# Altium PCB DataCollection.PcbDoc
Units mm, origin at the board's own origin, x right, y up, seen from the top; angles counter-clockwise.
Board outline 100 x 91.53 mm, 4 copper layers (Top Layer, GND, VCC, Bottom Layer); 127 components, 107 nets, 535 pads, 38 vias.
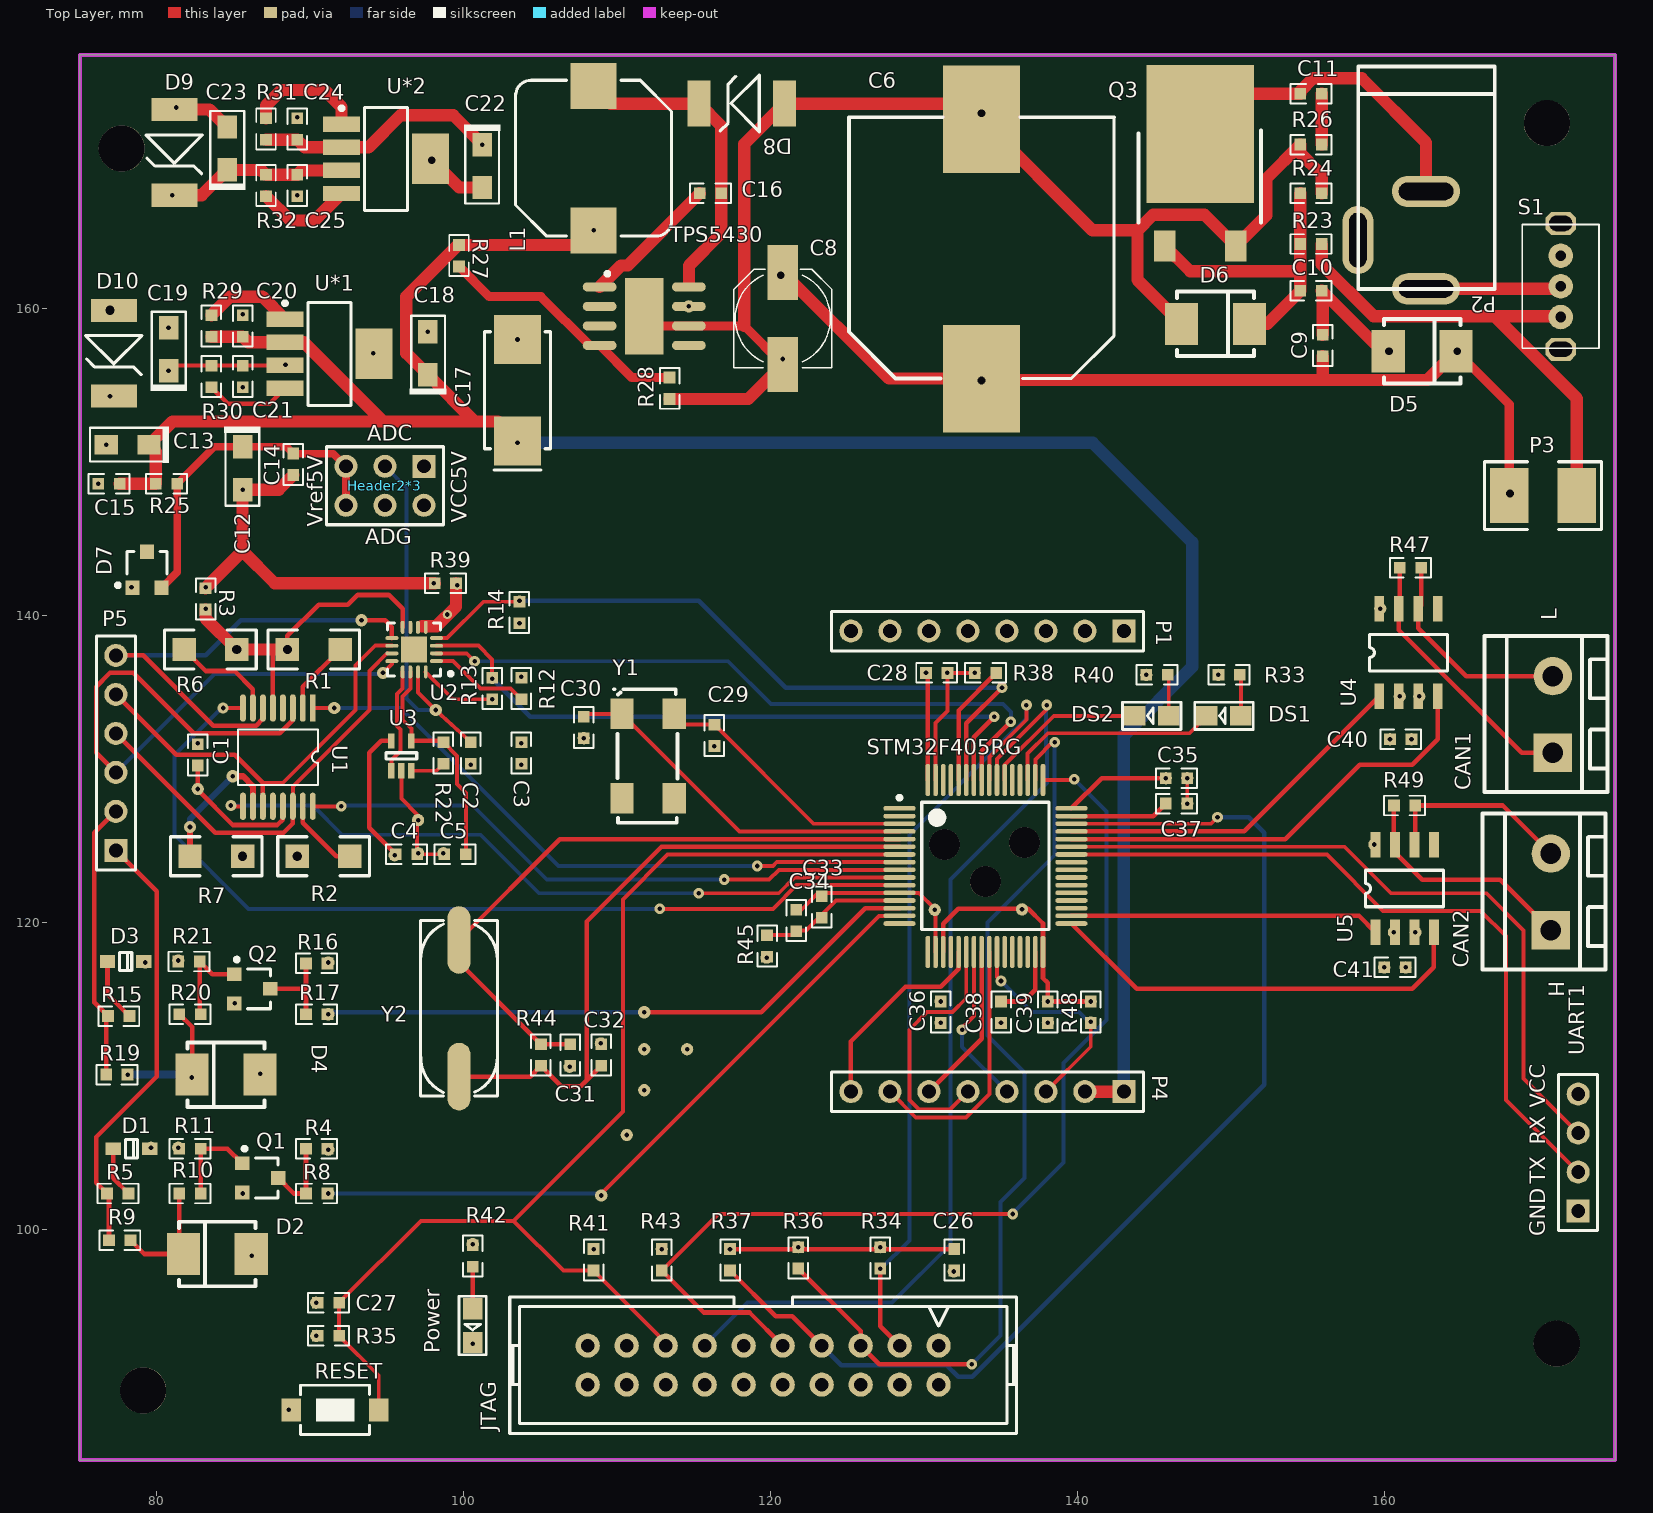
[diagram p0: Top Layer view]
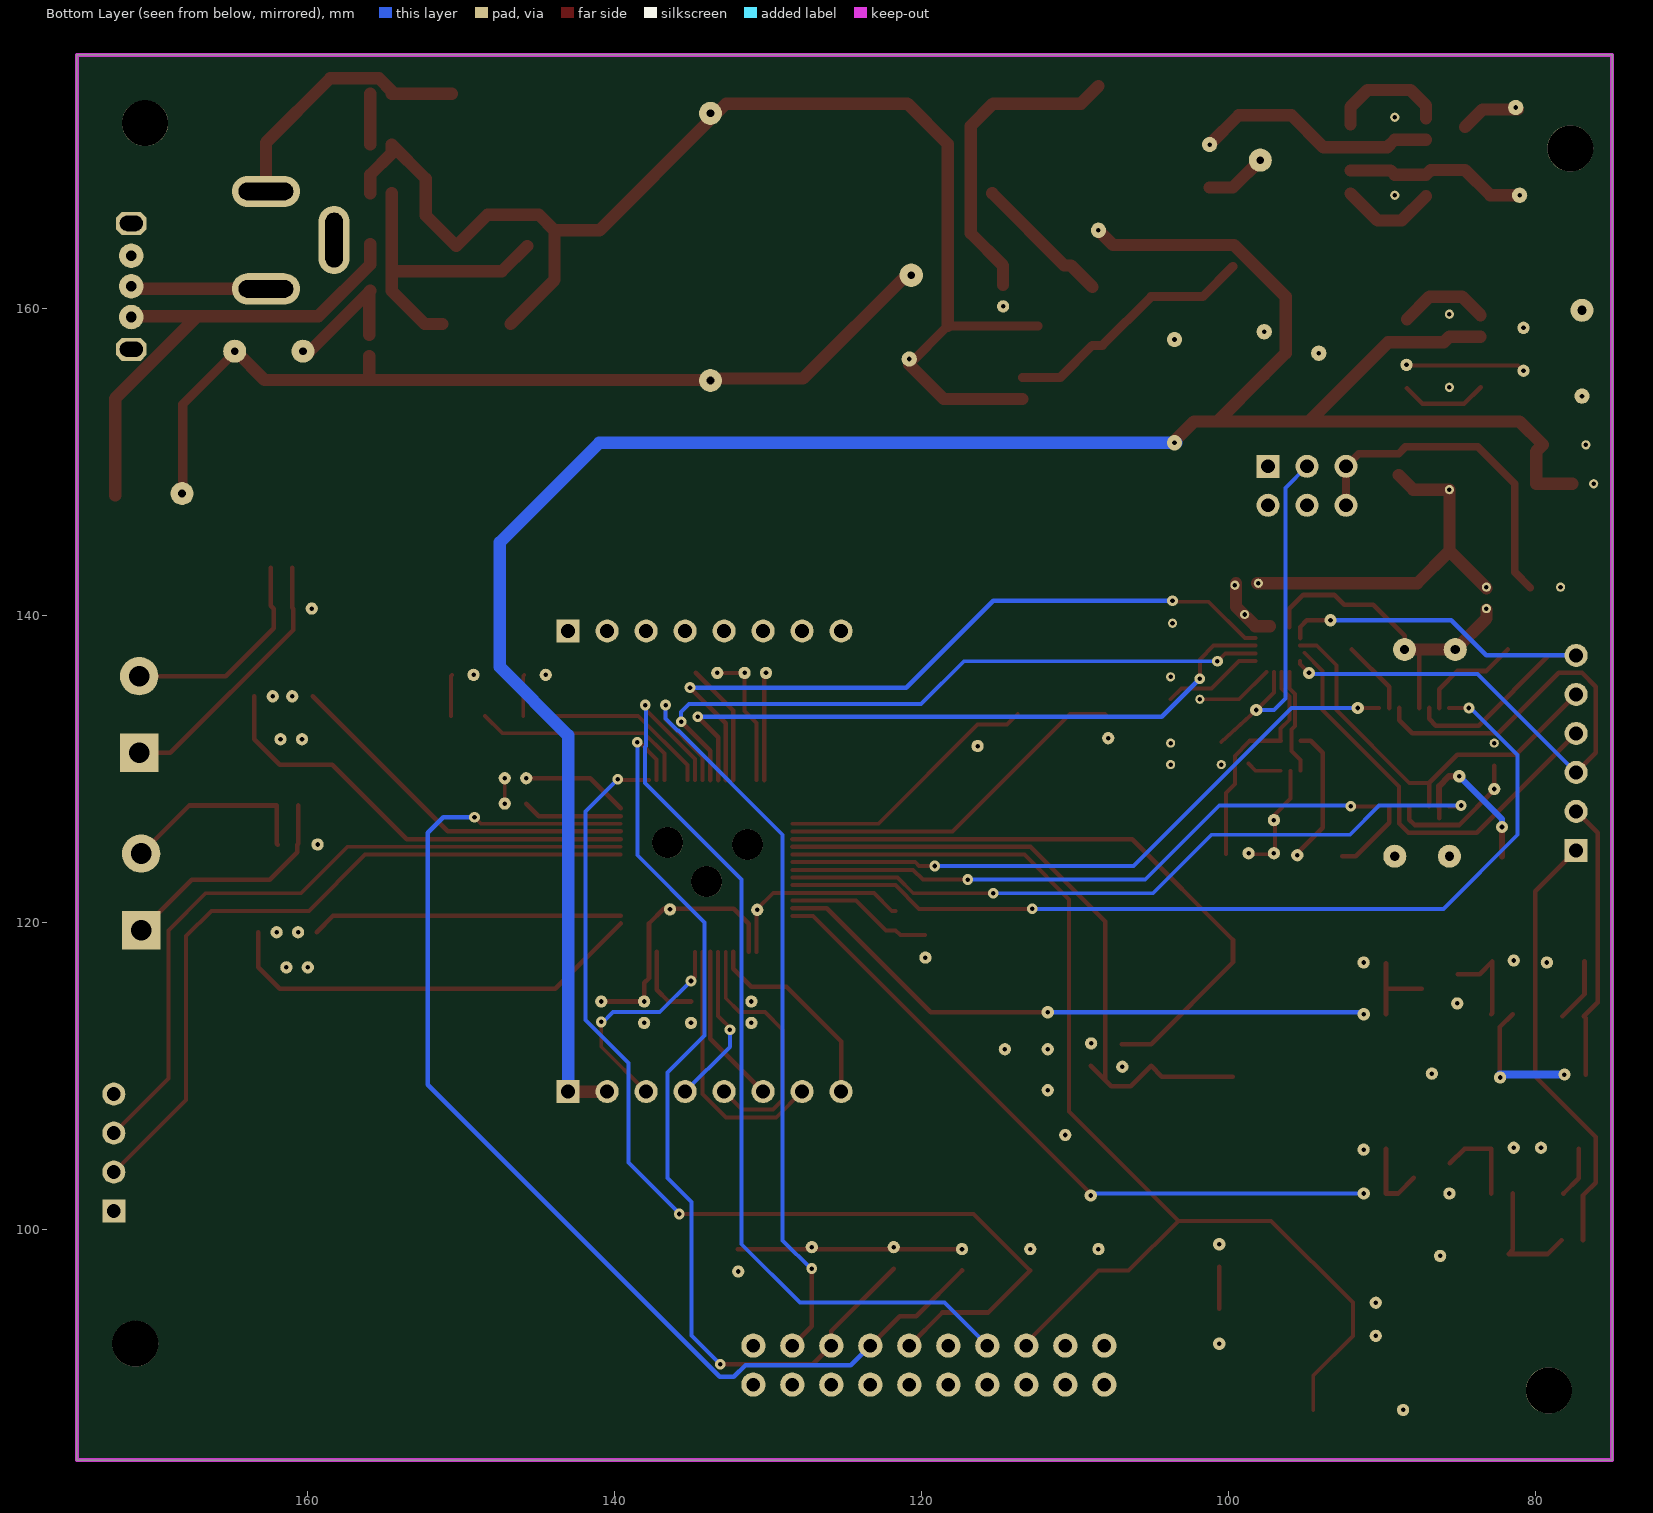
[diagram p1: Bottom Layer view, seen from below]
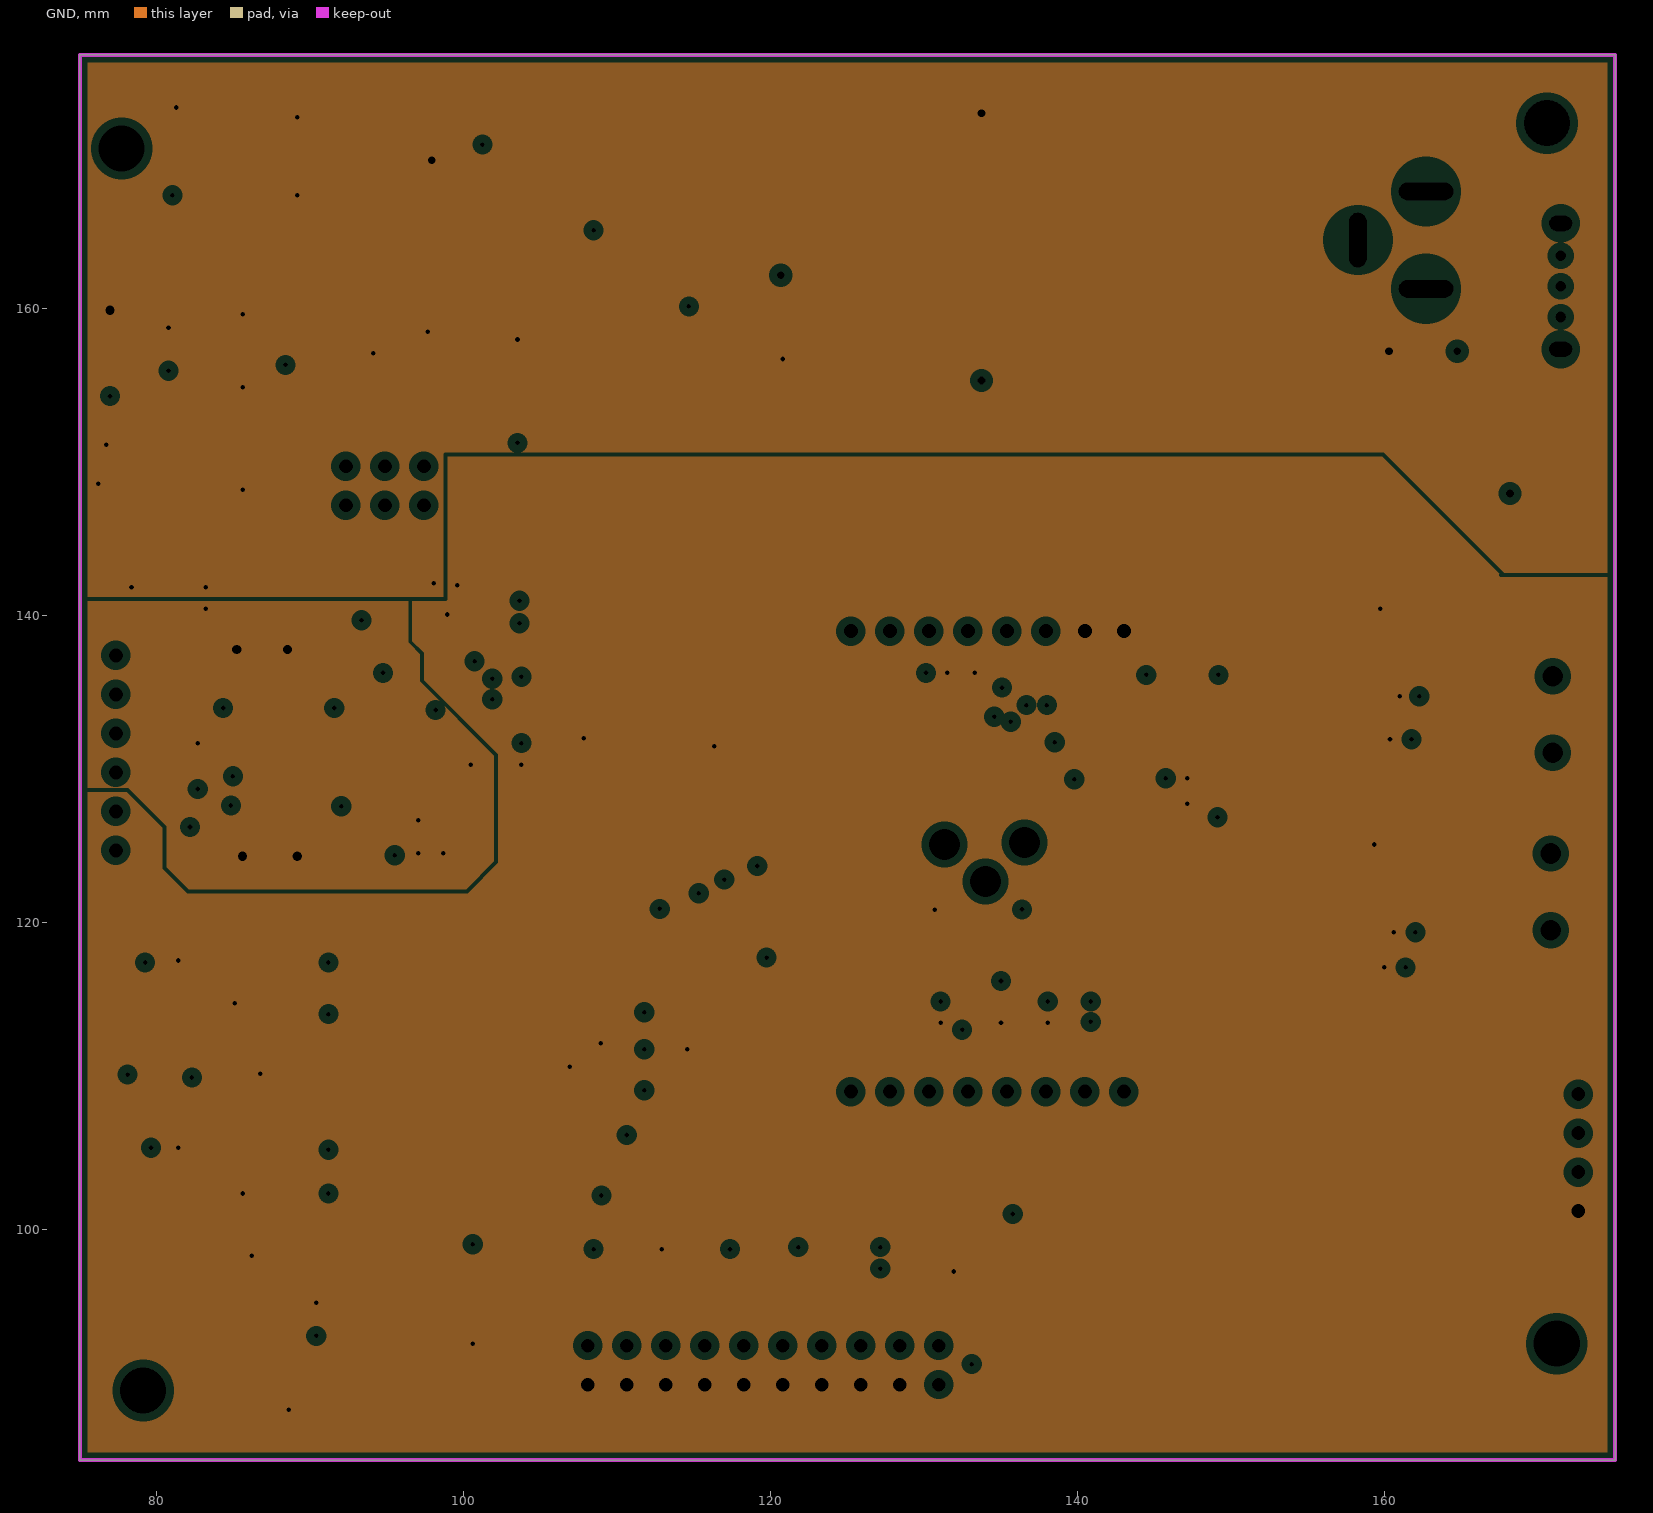
[diagram p2: GND, clearances drawn from the general rule]
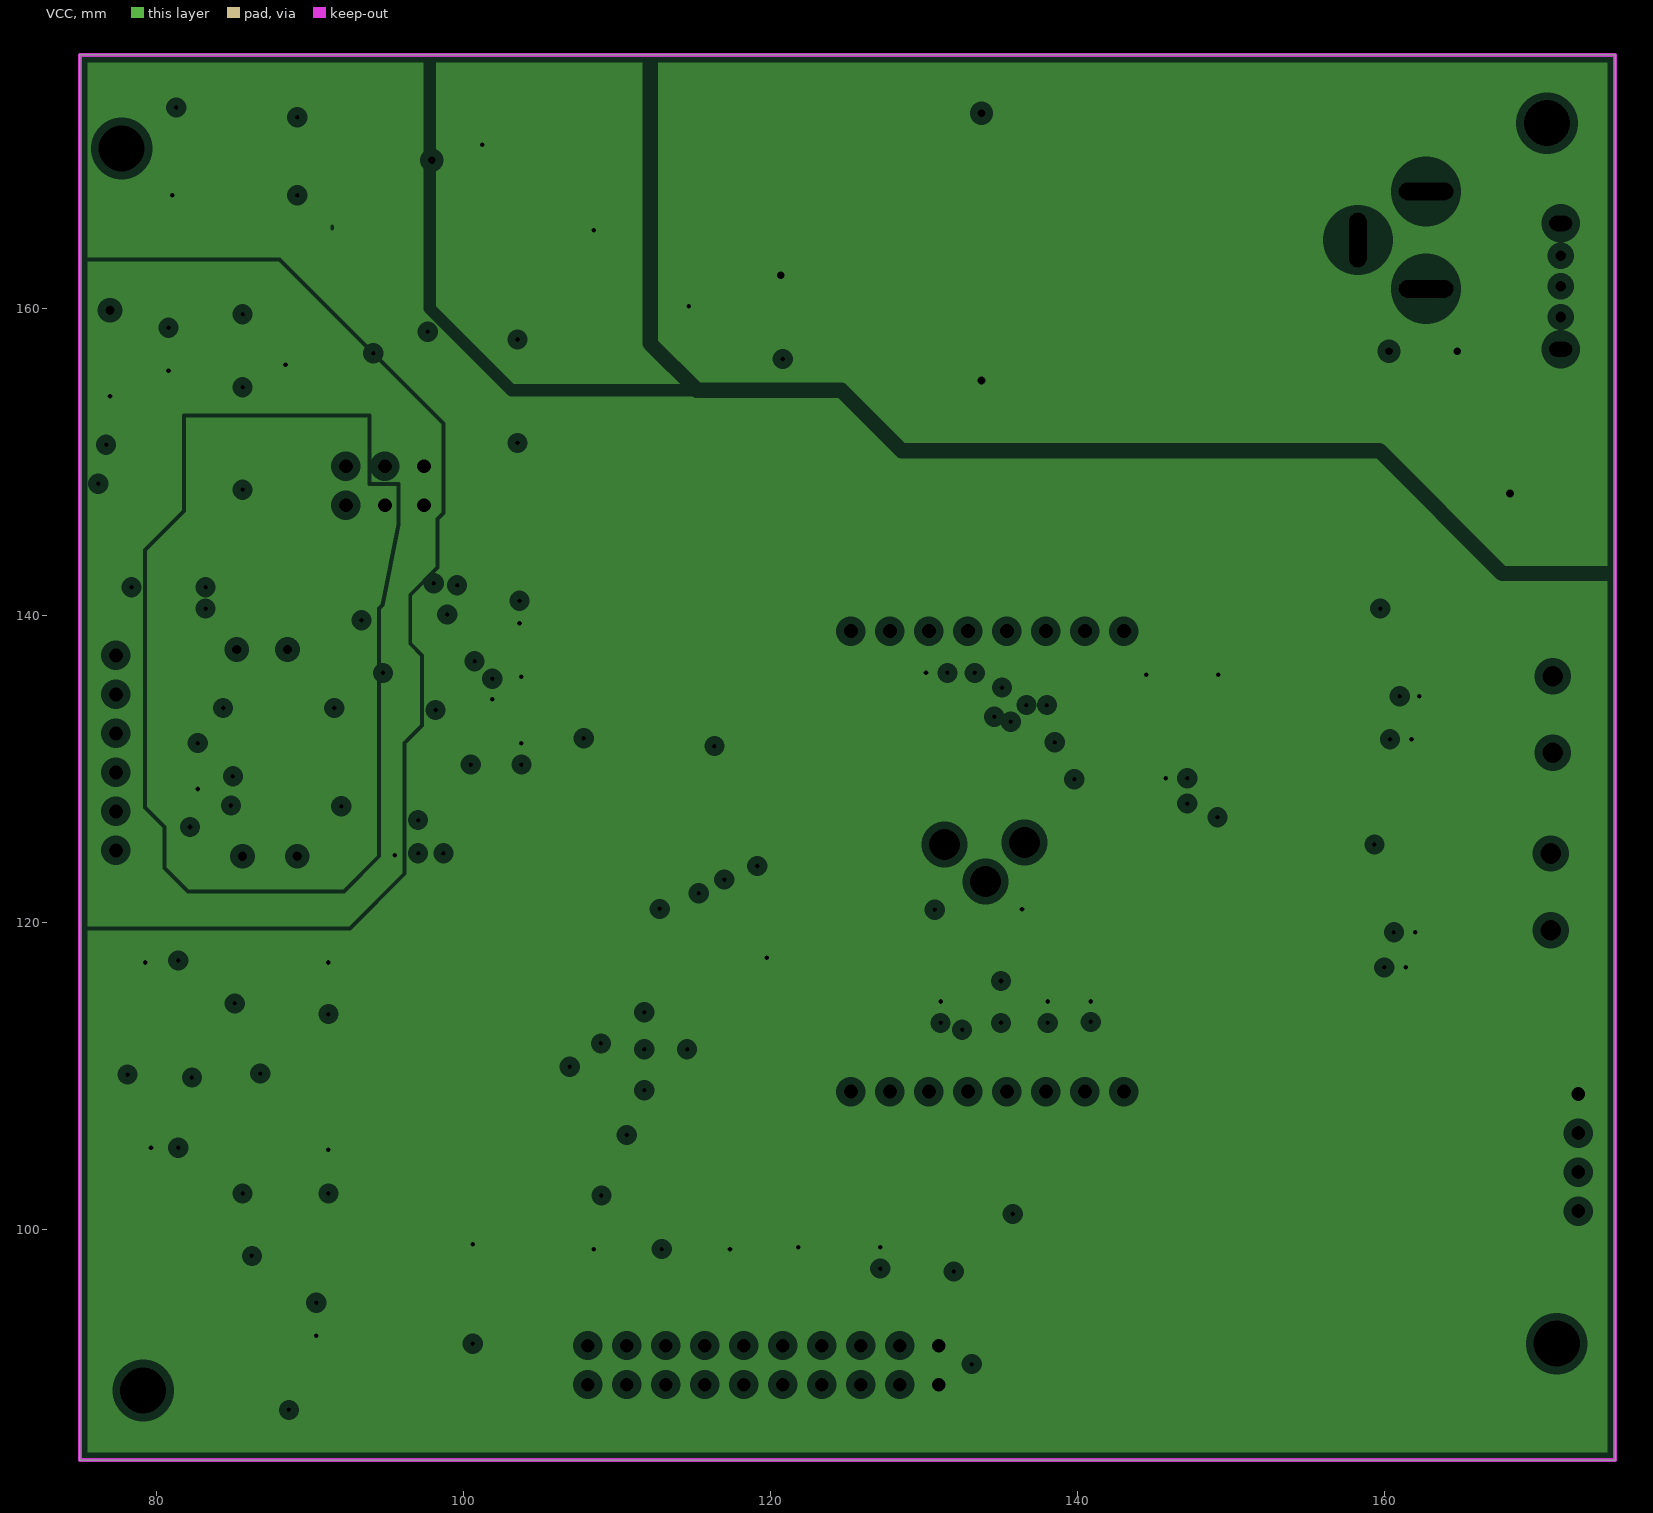
[diagram p3: VCC, clearances drawn from the general rule]
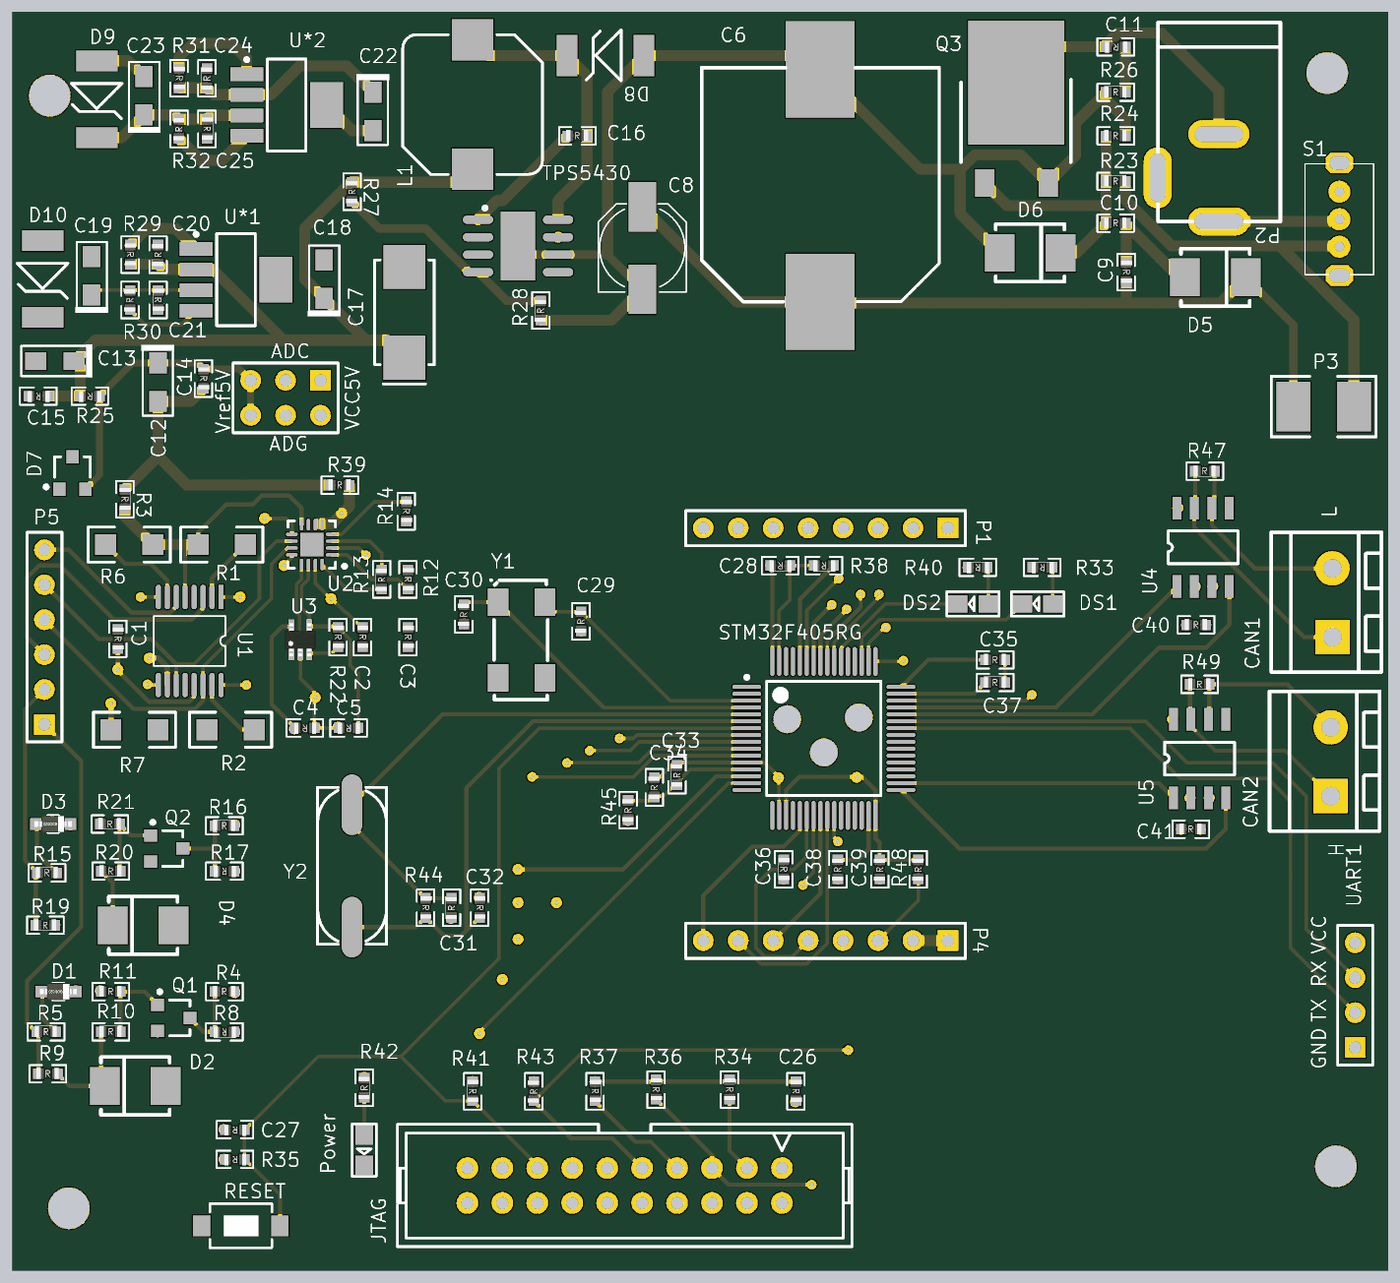
[diagram p4: 3D render of the assembled board from above, using the file's embedded part models]

## Layer stack, top to bottom
Top Layer: signal copper 0.0356
Dielectric: core 0.32, FR-4, Dk 4.8
GND: plane copper 0.0356, net (Multiple Nets)
Dielectric: prepreg 0.32, FR-4, Dk 4.8
VCC: plane copper 0.0356, net (Multiple Nets)
Dielectric: core 0.32, FR-4, Dk 4.8
Bottom Layer: signal copper 0.0356

## Board outline
75,176.53 175,176.53 175,85 75,85

## Design rules (kind name [scope] priority, off if disabled: settings)
Clearance [All] p1: gap=0.1
HoleSize [All] p1: absolutevalues=TRUE maxlimit=5 minlimit=0.3 maxpercent=80.000 minpercent=20.000
MinimumSolderMaskSliver [All] p1: minsoldermaskwidth=0
PlaneClearance [All] p1: clearance=0.508
PlaneConnect [All] p1: planeconnectstyle=Relief reliefexpansion=0.508 reliefentries=4 reliefconductorwidth=0.254 reliefairgap=0.254
PolygonConnect [All] p1: connectstyle=Relief reliefconductorwidth=0.254 reliefentries=4 polygonreliefangle="90 Angle" airgapwidth=0.254
RoutingVias [All] p1: holewidth=0.3 width=1 viastyle="Through Hole" minholewidth=0.3 minwidth=0.6 maxholewidth=0.8 maxwidth=3
SilkToSilkClearance [All] p1: silktosilkclearance=0
SilkToSolderMaskClearance [IsPad] p1: minsilkscreentomaskgap=0 clearancetoexposedcopper=TRUE
SolderMaskExpansion [All] p1: expansion=0.102
Width GND [(InNet('AGND') OR InNet('GND') OR InNet('NetP2_1'))] p1: maxlimit=0.8 minlimit=0.256 preferedwidth=0.6
Width 5Vand3V [(InNet('ADCIN') OR InNet('AVDD_ADC') OR InNet('VCC3V3') OR InNet('VCC5V') OR InNet('VREF5V'))] p2: maxlimit=0.8 minlimit=0.254 preferedwidth=0.4
Width 7V [InNet('VCC7V')] p3: maxlimit=0.8 minlimit=0.3 preferedwidth=0.6
Width 24V [(InNet('NetC11_2') OR InNet('VCC24V'))] p4: maxlimit=0.8 minlimit=0.3 preferedwidth=0.8
Width [All] p5: maxlimit=0.8 minlimit=0.254 preferedwidth=0.3
22 further rules are at their usual default settings.

## Classes and differential pairs
component class rock: C26 C27 C28 C29 C30 C31 C32 C33 C34 C35 C36 C37 C38 C39 C40 C41 CAN1 CAN2 DS1 DS2 JTAG P1 P4 Power R33 R34 R35 R36 R37 R38 R40 R41 R42 R43 R44 R45 R47 R48 R49 RESET STM32F405RG U4 U5 UART1 Y1 Y2
component class Power: C6 C8 C9 C10 C11 C12 C13 C14 C15 C16 C17 C18 C19 C20 C21 C22 C23 C24 C25 D5 D6 D7 D8 D9 D10 L1 P2 P3 Q3 R3 R23 R24 R25 R26 R27 R28 R29 R30 R31 R32 R39 S1 TPS5430 U*1 U*2
component class ADC: C1 C2 C3 C4 C5 D1 D2 D3 D4 Header2*3 P5 Q1 Q2 R1 R2 R4 R5 R6 R7 R8 R9 R10 R11 R12 R13 R14 R15 R16 R17 R19 R20 R21 R22 U1 U2 U3

## Components (designator, comment, footprint, x,y, rotation, side; value= is the part's Value field where it differs from the comment)
C1 "0.1uF" 0603 82.677,130.937 r270 top
C2 "1uF" 0603 100.457,131.064 r270 top
C3 "1uF" 0603 103.759,131.064 r270 top
C4 "1uF" 0603 96.266,124.46 r180 top
C5 "2.2nF" 0603 99.441,124.46 r180 top
C6 "470uF" SMD16 125.222,155.448 r90 top
C8 "22uF" SMD6 120.777,162.433 r270 top
C9 "0.1uF" 0603 155.956,157.607 r270 top
C10 "0.1uF" 0603 155.194,161.163 r0 top
C11 "0.1uF" 0603 155.194,173.99 r180 top
C12 "Cap Pol3" CAP-3216 85.598,149.606 r270 top
C13 "Cap Pol3" CAP-3216 78.105,151.13 r180 top
C14 "0.1uF" 0603 88.9,149.86 r270 top
C15 "0.1uF" 0603 76.898,148.59 r180 top
C16 "0.01uF" 0603 116.078,167.513 r0 top
C17 "220uF" CAP-7343 103.505,154.686 r90 top
C18 "Cap Pol3" CAP-3216 97.663,157.099 r90 top
C19 "Cap Pol3" CAP-3216 80.772,157.353 r90 top
C20 "0.1uF" 0603 85.598,158.877 r90 top
C21 "0.1uF" 0603 85.598,155.575 r270 top
C22 "Cap Pol3" CAP-3216 101.219,169.291 r270 top
C23 "Cap Pol3" CAP-3216 84.582,170.434 r90 top
C24 "0.1uF" 0603 89.154,171.704 r90 top
C25 "0.1uF" 0603 89.154,168.021 r270 top
C26 "0.1uF" 0603 131.953,98.044 r270 top
C27 "0.1uF" 0603 91.186,95.25 r180 top
C28 "0.1uF" 0603 130.81,136.271 r180 top
C29 "6pF" 0603 116.332,132.207 r90 top
C30 "6pF" 0603 107.823,132.715 r90 top
C31 "20pF" 0603 106.934,111.379 r90 top
C32 "20pF" 0603 108.966,111.379 r270 top
C33 "104" 0603 123.317,121.031 r90 top
C34 "104" 0603 121.666,120.142 r90 top
C35 "0.1uF" 0603 146.431,129.413 r0 top
C36 "104" 0603 131.064,114.173 r270 top
C37 "2.2uF" 0603 146.431,127.762 r0 top
C38 "2.2uF" 0603 135.001,114.173 r90 top
C39 "104" 0603 138.049,114.173 r90 top
C40 "0.1uF" 0603 161.036,131.953 r0 top
C41 "0.1uF" 0603 160.655,117.094 r0 top
CAN1 "CAN1" HEAD2L-0.8 170.942,131.064 r90 top
CAN2 "CAN2" HEAD2L-0.8 170.815,119.507 r90 top
D1 "LRB551V-30T1G" SOD-323 78.359,105.283 r180 top
D2 "SMBJ 6.5CA" DO-214AA 86.233,98.552 r0 top
D3 "LRB551V-30T1G" SOD-323 77.978,117.475 r180 top
D4 "SMBJ 6.5CA" DO-214AA 86.804,110.236 r0 top
D5 "SMBJ 24CA" DO-214AA 160.147,157.099 r180 top
D6 "SMBJ 6CA" DO-214AA 146.685,158.877 r180 top
D7 "LM4050AIM3" SOT-23 79.375,143.002 r0 top
D8 "B340A" SMBJ 118.237,173.355 r180 top
D9 "SMBJ3.3A" SMBJ 81.153,170.307 r270 top
D10 "SMBJ5A" SMBJ 77.216,157.226 r270 top
DS1 "LED1" SMDLED 150.622,133.477 r180 top
DS2 "LED2" SMDLED 145.923,133.477 r180 top
Header2*3 "Header2*3CHOOSE" HDR2X3_2 97.409,149.733 r180 top
JTAG "JTAG" JTAG_20 119.507,91.186 r180 top
L1 "Inductor" L-SMD-10 108.458,169.799 r270 top
P1 "Header 8" HDR8X1_A1 143,139 r180 top
P2 "POWER_JACK" DC_IN 162.687,161.29 r90 top
P3 "PTC" 1812 170.307,147.828 r180 top
P4 "Header 8" HDR8X1_A1 143,109 r180 top
P5 "Header 6" HDR6X1_A 77.343,124.714 r90 top
Power "LED3" SMDLED 100.584,94.869 r270 top
Q1 "9013" SOT-23 86.741,103.378 r270 top
Q2 "9013" SOT-23 86.233,115.697 r270 top
Q3 "RFD16N05LSM" TO-252AA 145.669,164.084 r0 top
R1 "240R" 1206 91.948,137.795 r180 top
R2 "240" 1206 89.154,124.333 r0 top
R3 "0R" 0603 83.185,141.097 r270 top
R4 "1K" 0603 90.424,105.283 r0 top
R5 "1K" 0603 77.47,102.362 r0 top
R6 "240R" 1206 81.788,137.795 r0 top
R7 "240" 1206 85.598,124.333 r180 top
R8 "0R" 0603 90.424,102.362 r180 top
R9 "1K" 0603 77.597,99.314 r0 top
R10 "1K" 0603 82.169,102.362 r0 top
R11 "10K" 0603 82.169,105.283 r0 top
R12 "10K" 0603 103.759,135.255 r270 top
R13 "3K" 0603 101.854,135.255 r90 top
R14 "3K" 0603 103.632,140.208 r270 top
R15 "1K" 0603 77.534,113.919 r0 top
R16 "1K" 0603 90.424,117.348 r0 top
R17 "0R" 0603 90.424,114.046 r180 top
R19 "1K" 0603 77.406,110.109 r0 top
R20 "1K" 0603 82.169,114.046 r0 top
R21 "10K" 0603 82.105,117.475 r0 top
R22 "499R" 0603 98.679,131.064 r270 top
R23 "18K" 0603 155.194,164.211 r0 top
R24 "6K" 0603 155.194,167.513 r0 top
R25 "1K" 0603 80.645,148.59 r180 top
R26 "1K" 0603 155.194,170.688 r0 top
R27 "10K" 0603 99.695,163.449 r90 top
R28 "1.75K" 0603 113.411,154.813 r90 top
R29 "Res1" 0603 83.566,158.877 r270 top
R30 "Res1" 0603 83.566,155.575 r90 top
R31 "Res1" 0603 87.122,171.704 r270 top
R32 "Res1" 0603 87.122,168.021 r90 top
R33 "1K" 0603 149.86,136.144 r180 top
R34 "10k" 0603 127.127,98.171 r270 top
R35 "10K" 0603 91.186,93.091 r180 top
R36 "10k" 0603 121.793,98.171 r270 top
R37 "10k" 0603 117.348,98.044 r270 top
R38 "10K" 0603 133.985,136.271 r180 top
R39 "0R" 0603 98.806,142.113 r0 top
R40 "1K" 0603 145.161,136.144 r180 top
R41 "10k" 0603 108.458,98.044 r270 top
R42 "1K" 0603 100.584,98.298 r90 top
R43 "10k" 0603 112.903,98.044 r90 top
R44 "10M" 0603 105.029,111.379 r270 top
R45 "10R" 0603 119.761,118.491 r90 top
R47 "120R" 0603 161.671,143.129 r0 top
R48 "10K" 0603 140.843,114.173 r90 top
R49 "120R" 0603 161.29,127.635 r0 top
RESET "SW-PB" SW_PB2_A2 91.567,88.265 r270 top
S1 "SWITCH" Switch_2mm 171.45,157.353 r0 top
STM32F405RG "STM" LQFP-64 133.985,123.698 r0 top
TPS5430 "TPS" NSO8_TP4056 111.76,159.512 r0 top
U1 "ADG711" TSSOP16 89.916,133.604 r270 top
U2 "ADS7924" WQFN16 96.774,137.795 r180 top
U3 "OPA313" SC70-5 95.25,129.794 r270 top
U4 "TJA1050/SN65HVD232DR" SOP-8 159.639,134.747 r90 top
U5 "TJA1050/SN65HVD232DR" SOP-8 159.385,119.38 r90 top
U*1 "LP3871-5V" SOT-223-5 88.646,159.258 r0 top
U*2 "LP3871-3V3" SOT-223-5 92.329,171.958 r0 top
UART1 "Header 4" HDR4X1_A 172.593,101.219 r90 top
Y1 "MC306" XTAL_8x3.8 112.014,130.81 r90 top
Y2 "8MHz" X-SM49 99.695,114.427 r90 top

## Footprints (in the part's own frame and the unit in brackets; to place one, negate y for a bottom-side part, rotate by r counter-clockwise, add the part's x,y. Pads: shape width x height; smd on the part's side, far side on the other; paste and mask are expansions set on the pad)
0603 [mil]
  rect 30x30 smd: 1(-27.5,0) 2(27.5,0)
  silkscreen extent -53,-25 53,25, body extent -32,-15 31,17, height 21
1206 [mil]
  rect 60x60 smd: 1(0,0) 2(135,0)
  silkscreen extent -50,-50 185,50
1812 [mm] "保险丝"
  rect 2.5x3.6 smd: 1(-2.2,0) 2(2.2,0)
  silkscreen extent -3.81,-2.2 3.81,2.2, body extent -2.54,-1.65 2.67,1.65, height 1.2
CAP-3216 [mil] "钽电容"
  rect 60x50 smd: 1(-55,0) 2(55,0)
  silkscreen extent -106,-48 96,46
CAP-7343 [mm] "钽电容"
  rect 3.2x3.05 smd: 1(-3.302,0) 2(3.302,0)
  silkscreen extent -5.21,-2.16 3.81,2.16, body extent -3.68,-1.91 3.68,1.91, height 2.95
DC_IN [mil]
  oval 80x175 hole 45 slot 140 at 90 deg: 1(0,0) 2(250,0)
  oval 175x80 hole 45 slot 140 at 0 deg: 3(125,175)
  silkscreen extent 0,-176 570,174
DO-214AA [mil]
  rect 85x107.99 smd: 1(-2.99,-5) 2(-177.01,-5)
  silkscreen extent -188,-88 8,78
HDR2X3_2 [mm]
  rect 1.5x1.5 hole 0.9: 1(0,0)
  round 1.5 hole 0.9: 2(0,2.54) 3(2.54,0) 4(2.54,2.54) 5(5.08,0) 6(5.08,2.54)
  silkscreen extent -1.27,-1.27 6.35,3.81
HDR4X1_A [mm] "Connector; Header; 4 Position"
  rect 1.5x1.5 hole 0.9: 1(0,0)
  round 1.5 hole 0.9: 2(2.54,0) 3(5.08,0) 4(7.62,0)
  silkscreen extent -1.27,-1.27 8.89,1.27
HDR6X1_A [mm] "Connector; Header; 4 Position"
  rect 1.5x1.5 hole 0.9: 1(0,0)
  round 1.5 hole 0.9: 2(2.54,0) 3(5.08,0) 4(7.62,0) 5(10.16,0) 6(12.7,0)
  silkscreen extent -1.27,-1.27 13.97,1.27
HDR8X1_A1 [mm] "Connector; Header; 8x1 Position"
  rect 1.5x1.5 hole 0.9: 1(0,0)
  round 1.5 hole 0.9: 2(2.54,0) 3(5.08,0) 4(7.62,0) 5(10.16,0) 6(12.7,0) 7(15.24,0) 8(17.78,0)
  silkscreen extent -1.27,-1.27 19.05,1.3
HEAD2L-0.8 [mm]
  rect 2.5x2.5 hole 1.35: 1(0,0)
  round 2.5 hole 1.35: 2(5,0)
  silkscreen extent -2.54,-3.56 7.62,4.45
JTAG_20 [mil]
  round 62 hole 35: 1(-450,-50) 2(-450,50) 3(-350,-50) 4(-350,50) 5(-250,-50) 6(-250,50) 7(-150,-50) 8(-150,50) 9(-50,-50) 10(-50,50) 11(50,-50) 12(50,50) 13(150,-50) 14(150,50) 15(250,-50) 16(250,50) 17(350,-50) 18(350,50) 19(450,-50) 20(450,50)
  silkscreen extent -650,-175 650,175
L-SMD-10 [mm] "贴片电感10*10"
  rect 3x3 smd: 1(-4.699,0) 2(4.699,0)
  silkscreen extent -5.08,-5.08 5.08,5.08, body extent -5.08,-5.08 5.08,5.08, height 4
LQFP-64 [mm] "LQFP64"
  oval 2.1x0.3 smd: 1(-5.6,3.75) 2(-5.6,3.25) 3(-5.6,2.75) 4(-5.6,2.25) 5(-5.6,1.75) 6(-5.6,1.25) 7(-5.6,0.75) 8(-5.6,0.25) 9(-5.6,-0.25) 10(-5.6,-0.75) 11(-5.6,-1.25) 12(-5.6,-1.75) 13(-5.6,-2.25) 14(-5.6,-2.75) 15(-5.6,-3.25) 16(-5.6,-3.75) 33(5.6,-3.75) 34(5.6,-3.25) 35(5.6,-2.75) 36(5.6,-2.25) 37(5.6,-1.75) 38(5.6,-1.25) 39(5.6,-0.75) 40(5.6,-0.25) 41(5.6,0.25) 42(5.6,0.75) 43(5.6,1.25) 44(5.6,1.75) 45(5.6,2.25) 46(5.6,2.75) 47(5.6,3.25) 48(5.6,3.75)
  oval 0.3x2.1 smd: 17(-3.75,-5.6) 18(-3.25,-5.6) 19(-2.75,-5.6) 20(-2.25,-5.6) 21(-1.75,-5.6) 22(-1.25,-5.6) 23(-0.75,-5.6) 24(-0.25,-5.6) 25(0.25,-5.6) 26(0.75,-5.6) 27(1.25,-5.6) 28(1.75,-5.6) 29(2.25,-5.6) 30(2.75,-5.6) 31(3.25,-5.6) 32(3.75,-5.6) 49(3.75,5.6) 50(3.25,5.6) 51(2.75,5.6) 52(2.25,5.6) 53(1.75,5.6) 54(1.25,5.6) 55(0.75,5.6) 56(0.25,5.6) 57(-0.25,5.6) 58(-0.75,5.6) 59(-1.25,5.6) 60(-1.75,5.6) 61(-2.25,5.6) 62(-2.75,5.6) 63(-3.25,5.6) 64(-3.75,5.6)
  silkscreen extent -5.72,-4.15 4.15,4.57, body extent -5,-5 5,5, height 1.6
NSO8_TP4056 [mm] "SOIC-max660"
  oval 2.2x0.6 smd: 1(-2.908,1.905) 2(-2.908,0.635) 3(-2.908,-0.635) 4(-2.908,-1.905) 5(2.908,-1.905) 6(2.908,-0.635) 7(2.908,0.635) 8(2.908,1.905)
  rect 2.5x5 smd: 9(0,0)
  silkscreen extent -2.52,2.63 -2.27,2.88
SC70-5 [mm]
  rect 1x0.42 smd mask+0.051: 1(-0.108,0.04) 2(-0.108,0.69) 3(-0.108,1.34) 4(-2.048,1.34) 5(-2.048,0.04)
  silkscreen extent -1.28,-0.31 -0.88,1.69, body extent -2.28,-0.41 0.12,1.79, height 1.1
SMBJ [mm]
  rect 1.5x3 smd: 1(-2.667,0) 2(2.921,0)
  silkscreen extent -1.02,-1.85 1.52,1.83
SMD6 [mm]
  rect 3.6x2 smd: 1(0.071,0.009) 2(6.071,0.009)
  silkscreen extent -0.13,-3.19 6.27,3.21
SMD16 [mm]
  rect 7x5 smd: 1(0,-8.5) 2(16.891,-8.5)
  silkscreen extent 0.01,-17.14 17.02,0.13, body extent 0,-17.15 17.02,0.25, height 10.9
SMDLED [mm] "贴片LED"
  rect 1.4x1.27 smd: 1(0.001,-0.002) 2(2.211,-0.002)
  silkscreen extent -0.8,-0.89 3.01,0.89
SOD-323 [mm]
  rect 1x0.83 smd: 1(1.18,0) 2(-1.18,0)
  silkscreen extent -0.4,-0.6 0.4,0.6, body extent -1.35,-0.62 1.35,0.63, height 1.1
SOP-8 [mil]
  rect 65x25 smd: 1(0,0) 2(0,-50) 3(0,-100) 4(0,-150) 5(224.41,-150) 6(224.41,-100) 7(224.41,-50) 8(224.41,0)
  silkscreen extent 65,-175 159,25
SOT-23 [mm]
  rect 0.9x0.95 smd: 1(-0.95,-1.175) 2(0.95,-1.175) 3(0,1.175)
  silkscreen extent -2.03,-1.14 1.3,1.18
SOT-223-5 [mm]
  rect 2.4x1 smd: 1(-0.285,0.047) 2(-0.285,-1.453) 3(-0.285,-2.953) 4(-0.285,-4.453)
  rect 2.4x3.3 smd: 5(5.515,-2.203)
  silkscreen extent -0.41,-5.55 4.02,1.22, body extent 0.77,-5.55 4.47,1.15, height 1.8
SW_PB2_A2 [mm] "3*4mm"
  rect 1.5x1.25 smd: 1(0,2.9) 2(0,-2.8)
  silkscreen extent -1.6,-2.2 1.6,2.3, body extent -0.76,-1.14 0.76,1.27, height 1.2
Switch_2mm [mm]
  round 1.6 hole 0.7: 1(0,2.1) 2(0,4.1) 3(0,6.1)
  oct 2x1.5 hole 1 slot 1.5 at 0 deg: 4(0,8.2) 5(0,0)
  silkscreen extent -2.5,0.07 2.5,8.13
TO-252AA [mm]
  rect 1.4x2 smd: 1(0,0) 2(4.623,0)
  rect 7x9 smd: 3(2.3,7.3)
  silkscreen extent -1.72,1.52 6.26,7.51
TSSOP16 [mil]
  rect 70x15 smd: 1(-15,10)
  oval 70x15 smd: 2(-15,-15.59) 3(-15,-41.18) 4(-15,-66.77) 5(-15,-92.36) 6(-15,-117.95) 7(-15,-143.54) 8(-15,-169.13) 9(236.97,-169.13) 10(236.97,-143.54) 11(236.97,-117.95) 12(236.97,-92.36) 13(236.97,-66.77) 14(236.97,-41.18) 15(236.97,-15.59) 16(236.97,10)
  silkscreen extent 40,-182 182,23
WQFN16 [mm] "QFN, 16-Leads, Body 3.00x3.00mm, Pitch 0.50mm, Thermal Pad 1.70x1.70mm, IPC Medium Density"
  oval 0.85x0.25 smd: 1(-1.45,0.75) 2(-1.45,0.25) 3(-1.45,-0.25) 4(-1.45,-0.75) 9(1.45,-0.75) 10(1.45,-0.25) 11(1.45,0.25) 12(1.45,0.75)
  oval 0.25x0.85 smd: 5(-0.75,-1.45) 6(-0.25,-1.45) 7(0.25,-1.45) 8(0.75,-1.45) 13(0.75,1.45) 14(0.25,1.45) 15(-0.25,1.45) 16(-0.75,1.45)
  rect 1.7x1.7 smd: 17(0,0)
  silkscreen extent -2.5,-1.73 1.73,1.73, body extent -1.58,-1.58 1.58,1.58, height 0.8
X-SM49 [mm]
  oval 4.4x1.5 smd: 1(4.45,0.004) 2(-4.45,-0.004)
  silkscreen extent -5.7,-2.5 5.72,2.5
XTAL_8x3.8 [mm] "四脚晶振"
  rect 2x1.5 smd: 1(2.8,1.7) 2(-2.7,1.7) 3(-2.7,-1.7) 4(2.8,-1.7)
  silkscreen extent -4.3,-1.9 4.4,2.23

## Part data
C1 C2 C3 C4 C5 C14 C15 C16 C20 C21 C24 C25 C26 C27 C28 C29 C30 C31 C32 C33 C34 C35 C36 C37 C38 C39 C40 C41: library part C
C6: library part CAP+_100uF, "Cap,100uF,DIP"
C8: library part CAP+_100uF, "钽电容 SMD 6.3*5.5  50V"
C9 C10 C11: library part C_0.1uF, "Cap,0.1uF,104"
C12 C13 C18 C19 C22 C23: "Polarized Capacitor (Surface Mount)"
C17: library part CAP, "钽电容/220uF(227) ±10% 16V"
CAN1 CAN2: library part HEAD2
D1 D3: library part "D_DIODE LRB", "LRB551V-30T1G  20V  0.5A 肖特基二极管"
D2 D4: "TVS,SMBJ 6.5CA,600W SMD Transient Voltage Suppressor Diodes,"
D5 D6: library part "SMBJ 6.5CA", "TVS,SMBJ 6.5CA,600W SMD Transient Voltage Suppressor Diodes,"
D7: library part D
D8 D9 D10: library part SMBJ, "TVS"
DS1 Power: library part LED2, "Typical RED, GREEN, YELLOW, AMBER GaAs LED"
DS2: "Typical RED, GREEN, YELLOW, AMBER GaAs LED"
Header2*3: "2*3"
L1: "电感"
P1 P4: "Header, 8-Pin"
P5 UART1: "接插件"
Q1 Q2: library part L2SC4617RT1G, "L2SC4617RT1G"
Q3: library part IGBT-N, "Insulated Gate Bipolar Transistor (N-Channel)"
R1 R2 R6 R7 R8 R13 R14 R17 R22 R23 R24 R25 R26 R27 R28 R33 R34 R36 R37 R38 R40 R41 R42 R43 R44 R45 R47 R48 R49: library part R
R3 R4 R5 R9 R10 R11 R12 R15 R16 R19 R20 R21 R39: library part R_1K, "Res,1K,0603"
R29 R30 R31 R32: "贴片电阻"
R35: library part Res1, "贴片电阻"
RESET: "微动开关"
STM32F405RG: library part STM32F405RG, "STM32F405RG_64Pins"
TPS5430: library part TPS5430, "降压开关电源芯片"
U4 U5: library part SN65HVD230D
U*1: library part LP3871, "LDO电源芯片5V"
U*2: library part LP3871, "LDO电源芯片3V3"
Y1: library part XTAL_8x3.8, "贴片晶振MC306"
Y2: library part XTAL, "Crystal Oscillator"

## Free pads (board coordinates)
  round 3 hole 3: 0(77.724,170.434) 0(79.121,89.535) 0(170.561,172.085) 0(171.196,92.583)
  round 0.8 hole 0.3: 0(114.668,160.147) 1(79.248,117.411) 1(79.629,105.346) 1(81.407,105.346) 1(81.407,117.538) 1(82.296,109.918) 1(82.677,128.714) 1(85.09,114.745) 1(86.741,110.172) 1(91.186,105.219) 1(91.186,117.411) 1(95.504,124.396) 1(97.028,124.523) 1(97.028,126.682) 1(98.679,124.523) 1(107.823,132.022) 1(108.458,98.742) 1(112.903,98.742) 1(116.332,131.508) 1(117.348,98.742) 1(121.793,98.87) 1(127.127,98.87) 2(80.772,155.956) 2(80.772,158.75) 2(88.392,156.337) 2(110.617,106.172) 2(111.76,109.093) 2(111.76,111.76) 2(114.554,111.76) 5(85.598,102.362) 5(86.201,98.298) 5(88.614,88.265) 5(90.392,93.091) 5(90.392,95.25) 5(106.902,110.617) 5(108.934,112.141) 5(119.729,117.729) 5(131.921,97.282) 6(130.112,136.271) 6(131.508,136.271) 6(133.286,136.271) 6(144.463,136.144) 6(145.732,129.413) 6(147.13,127.762) 6(147.13,129.413) 6(149.161,136.144) 6(159.321,125.095) 6(159.702,140.462) 6(159.957,117.094) 6(160.338,131.953) 6(160.591,119.38) 6(160.972,134.747) 6(161.353,117.094) 6(161.734,131.953) 6(161.988,119.38) 6(162.243,134.747) 8(130.683,120.84) 8(131.064,113.474) 8(131.064,114.871) 8(135.001,113.474) 8(136.368,120.87) 8(138.049,113.474) 8(138.049,114.871) 8(140.843,114.871)
  round 1.524 hole 0.5: 0(120.65,162.179)
  round 0.6 hole 0.3: 2(76.2,148.59) 2(76.708,151.13) 2(78.359,141.859) 2(82.677,131.699) 2(83.185,140.462) 2(83.185,141.859) 2(85.598,148.209) 2(85.598,154.876) 2(85.598,159.639) 2(89.154,167.386) 2(89.154,172.466) 2(98.044,142.113) 2(98.933,140.081) 2(99.568,141.986) 2(100.457,130.302) 2(101.854,134.556) 2(103.632,139.51) 2(103.759,130.302) 2(103.759,131.699) 2(103.759,136.017)
  round 1 hole 0.3: 2(76.962,154.305) 2(81.026,167.386) 2(81.28,173.101) 2(94.107,157.099) 2(97.663,158.496) 2(101.219,170.688) 2(103.505,157.988) 2(108.458,165.1) 2(120.777,156.718)
  round 1.5 hole 0.6: 2(76.962,159.893) 2(85.217,137.795) 2(85.598,124.333) 2(88.519,137.795) 2(89.154,124.333)
  round 1.5 hole 0.5: 2(97.917,169.672) 2(133.731,155.321) 2(133.731,172.72) 2(160.274,157.226) 2(164.719,157.226) 2(168.148,147.955)
  round 2 hole 2: 9(131.318,125.095) 9(133.985,122.682) 9(136.525,125.222)

## Via types
v1: diameter 0.7, hole 0.3, Top Layer to Bottom Layer, 24 vias
v2: diameter 0.8, hole 0.3, Top Layer to Bottom Layer, 13 vias
v3: diameter 1, hole 0.3, Top Layer to Bottom Layer, 1 vias

## Nets (pads, with @x,y where several pads share a name; then routed paths per layer and width w, separated by ;. In a path a pad name is that pad's centre, name@x,y a point inside that pad or via, vN(x,y) a via of type N, cw(c..) or ccw(c..) an arc to the next point about the centre after c; other vN are vias at no path point)
ADC_INT: STM32F405RG.57 U2.2 | length 44.2
  Top Layer w0.256: U2.2 100.199,137.545 v1(100.711,137.033)
  Top Layer w0.3: STM32F405RG.57 133.735,131.195 v1(135.636,133.096)
  Bottom Layer w0.256: v1(100.711,137.033) 117.221,137.033 120.015,134.239 135.128,134.239 135.636,133.731 v1(135.636,133.096)
ADCIN: C5.1 R22.1 U2.14 U3.4 | length 15
  Top Layer w0.256: U2.14 96.524,135.259 96.012,134.747 96.012,133.223 96.59,132.645 U3.4 ; R22.1@98.6,131.842 R22.1 99.568,130.874 99.568,129.032 100.139,128.46 C5.1
  Top Layer w0.3: U3.4 R22.1@98.6,131.842
AGND: C1.1 C2.2 C4.1 C5.2 pad.1@97.028,124.523 pad.1@97.028,126.682 pad.1@98.679,124.523 pad.2@82.677,131.699 pad.2@83.185,140.462 pad.2@85.217,137.795 pad.2@85.598,124.333 pad.2@88.519,137.795 pad.2@89.154,124.333 pad.2@100.457,130.302 R1.2 R2.1 R3.2 R6.2 R7.1 U1.5 U2.8 U3.2 | length 29.3
  Top Layer w0.256: U3.2 95.94,128.088 96.965,127.063 C4.1 C5.2
  Top Layer w0.3: 87.503,137.795 87.57,137.728 U1.5 ; R1.2 88.519,138.684 90.551,140.716 92.456,140.716 93.091,141.351 95.123,141.351 96.024,140.45 U2.8
  Top Layer w0.8: R3.2 83.185,139.827 R6.2 87.503,137.795 R1.2
AVDD_ADC: C2.1 Header2*3.3 U2.15 | length 24
  Top Layer w0.256: U2.15 97.024,135.005 v2(98.171,133.858) C2.1
  Bottom Layer w0.256: Header2*3.3 96.286,148.316 96.286,134.6 97.028,133.858 v2(98.171,133.858)
BOOT1: STM32F405RG.28
CAN1_RX: STM32F405RG.44 U4.4 | length 29.4
  Top Layer w0.3: STM32F405RG.44 153.515,125.448 158.369,130.302 161.798,130.302 163.449,131.953 U4.4
CAN1_TX: STM32F405RG.45 U4.1 | length 23.7
  Top Layer w0.3: STM32F405RG.45 150.84,125.948 U4.1
CAN2_RX: STM32F405RG.33 U5.4 | length 28.2
  Top Layer w0.3: STM32F405RG.33 143.836,115.697 161.798,115.697 163.195,117.094 U5.4
CAN2_TX: STM32F405RG.34 U5.1 | length 20.2
  Top Layer w0.3: STM32F405RG.34 158.317,120.448 U5.1
CH1: P5.3 U1.3 U2.12 | length 43.1
  Top Layer w0.256: v2(94.742,136.271) 95.324,136.853 U2.12
  Top Layer w0.3: P5.3 76.073,131.064 76.073,135.382 76.962,136.271 78.486,136.271 82.423,132.334 88.011,132.334 88.87,133.193 U1.3
  Bottom Layer w0.256: P5.3 83.757,136.208 v2@94.679,136.208
CH2: P5.4 U1.14 U2.11 | length 28.1
  Top Layer w0.256: U1.14 88.87,128.875 93.853,133.858 93.853,136.404 U2.11@95.034,137.585
  Top Layer w0.3: P5.4 83.82,125.857 88.265,125.857 88.87,126.462 U1.14
CH3: P5.5 U1.11 U2.10 | length 27.3
  Top Layer w0.256: U1.11 U1.11@86.92,127.814 ; 86.92,129.107 88.213,129.107 92.964,133.858 92.964,136.771 94.238,138.045 U2.10
  Top Layer w0.3: P5.5 81.28,130.937 85.09,130.937 86.92,129.107 U1.11@86.92,127.814
CH4: P5.6 U1.6 U2.9 | length 32.2
  Top Layer w0.3: P5.6 79.121,137.414 83.693,132.842 86.487,132.842 86.92,133.275 U1.6 ; v2(93.345,139.7) 94.89,139.7 95.324,139.266 U2.9
  Bottom Layer w0.3: P5.6 83.185,137.414 85.471,139.7 v2(93.345,139.7)
DGND: C3.2 C26.2 C27.2 C28.1 C29.1 C30.1 C31.1 C32.1 C33.2 C34.2 C35.2 C36.2 C37.2 C38.1 C39.1 C40.1 C41.1 D2.1 D4.1 JTAG.4 JTAG.6 JTAG.8 JTAG.10 JTAG.12 JTAG.14 JTAG.16 JTAG.18 JTAG.20 P1.1 P1.2 pad.1@81.407,105.346 pad.1@81.407,117.538 pad.1@85.09,114.745 pad.1@86.741,110.172 pad.1@107.823,132.022 pad.1@112.903,98.742 pad.1@116.332,131.508 pad.2@98.933,140.081 pad.2@99.568,141.986 pad.2@103.759,130.302 pad.2@114.554,111.76 pad.5@85.598,102.362 pad.5@86.201,98.298 pad.5@88.614,88.265 pad.5@90.392,95.25 pad.5@106.902,110.617 pad.5@108.934,112.141 pad.5@131.921,97.282 pad.6@131.508,136.271 pad.6@133.286,136.271 pad.6@147.13,127.762 pad.6@147.13,129.413 pad.6@159.321,125.095 pad.6@159.702,140.462 pad.6@159.957,117.094 pad.6@160.338,131.953 pad.6@160.591,119.38 pad.6@160.972,134.747 pad.8@130.683,120.84 pad.8@131.064,113.474 pad.8@135.001,113.474 pad.8@138.049,113.474 Power.2 Q1.2 Q2.2 R11.1 R21.1 R38.2 R39.2 R43.2 RESET.2 STM32F405RG.12 STM32F405RG.18 STM32F405RG.63 U2.5 U2.6 U4.2 U4.8 U5.2 U5.8 UART1.1 | length 28
  Top Layer w0.256: C34.2@121.666,120.777 121.92,120.777 123.091,121.948 STM32F405RG.12 129.639,121.948 130.735,120.852 STM32F405RG.18 ; STM32F405RG.63 130.735,133.021 131.508,133.794 C28.1 R38.2 ; C37.2 C35.2 ; U5.8@159.385,124.885 U5.8
  Top Layer w0.8: 97.282,139.319 98.236,139.319 99.504,140.587 R39.2
  other v2: 100.584,92.583
DIGITAL_INPUT1: R8.1 STM32F405RG.15 | length 44.9
  Top Layer w0.256: v2(108.966,102.235) 108.966,102.362 127.052,120.448 STM32F405RG.15
  Bottom Layer w0.256: v2(91.186,102.362) 108.839,102.362 v2(108.966,102.235)
DIGITAL_INPUT2: R17.1 STM32F405RG.14 | length 40.1
  Top Layer w0.3: v2(111.76,114.173) 119.38,114.173 126.155,120.948 STM32F405RG.14
  Bottom Layer w0.3: v2(91.186,114.046) 91.313,114.173 v2(111.76,114.173)
DIO1: P5.1 R5.1 R9.1 | length 28.5
  Top Layer w0.3: R9.1 76.898,102.235 R5.1 76.073,103.06 76.073,106.045 80.01,109.982 80.01,122.047 P5.1
DIO2: P5.2 R15.1 R19.1 | length 18.1
  Top Layer w0.3: R19.1 76.708,113.792 R15.1 75.946,114.808 75.946,125.857 P5.2
EN1: STM32F405RG.8 U1.1 | length 42.6
  Top Layer w0.256: U1.1 v2(91.567,133.985) ; v1(119.126,123.698) 120.142,123.698 120.392,123.948 STM32F405RG.8
  Bottom Layer w0.256: v2(91.567,133.985) 95.885,133.985 106.172,123.698 v1(119.126,123.698)
EN2: STM32F405RG.9 U1.16 | length 40.5
  Top Layer w0.256: U1.16 v1(92.025,127.585) ; v1(116.967,122.809) 119.888,122.809 120.527,123.448 STM32F405RG.9
  Bottom Layer w0.256: v1(92.025,127.585) 92.068,127.628 100.591,127.628 105.41,122.809 v1(116.967,122.809)
EN3: STM32F405RG.10 U1.9 | length 47.2
  Top Layer w0.256: v1@84.759,127.585 U1.9 ; v1(115.316,121.92) 120.523,121.92 121.551,122.948 STM32F405RG.10
  Bottom Layer w0.256: v1(84.836,127.635) 90.17,127.635 92.075,125.73 101.092,125.73 104.902,121.92 v1(115.316,121.92)
EN4: STM32F405RG.11 U1.8 | length 60.9
  Top Layer w0.256: v1(84.328,133.985) U1.8 ; v1@112.649,120.904 120.142,120.904 121.686,122.448 STM32F405RG.11
  Bottom Layer w0.256: v1(84.328,133.985) 84.216,133.985 81.153,130.922 81.153,125.73 85.979,120.904 v1(112.776,120.904)
GND: C6.2 C8.2 C9.1 C10.2 C12.2 C13.2 C14.2 C15.2 C17.2 C18.2 C19.2 C20.2 C21.2 C22.2 C23.2 C24.2 C25.2 D5.1 D6.1 D7.1 D8.1 D9.1 D10.1 pad.2@76.2,148.59 pad.2@76.708,151.13 pad.2@76.962,159.893 pad.2@78.359,141.859 pad.2@80.772,158.75 pad.2@81.28,173.101 pad.2@83.185,141.859 pad.2@85.598,148.209 pad.2@85.598,154.876 pad.2@85.598,159.639 pad.2@89.154,167.386 pad.2@89.154,172.466 pad.2@94.107,157.099 pad.2@97.663,158.496 pad.2@97.917,169.672 pad.2@98.044,142.113 pad.2@103.505,157.988 pad.2@120.777,156.718 pad.2@133.731,172.72 pad.2@160.274,157.226 Q3.2 R3.1 R24.2 R26.1 R28.1 R39.1 TPS5430.6 TPS5430.9 U*1.5 U*2.5 | length 128.1
  Top Layer w0.6: TPS5430.9@112.395,158.877 TPS5430.6 118.271,158.877 C8.2
  Top Layer w0.8: D9.1 83.439,172.974 C23.2 ; R3.1 85.598,144.208 ; C14.2 87.947,148.209 C12.2 85.598,144.208 ; U*2.5 99.705,167.894 C22.2 ; R39.1 87.694,142.113 85.598,144.208 ; R28.1 118.538,154.114 C8.2 ; 118.271,158.877 118.271,170.722 D8.1 132.706,173.355 C6.2 140.961,165.1 143.891,165.1 ; D6.1 143.891,161.874 143.891,165.1 ; C10.2 C10.2@155.956,161.1 ; R24.2 155.892,168.719 154.495,170.117 R26.1 152.273,168.465 152.273,166.065 Q3.2 148.26,166.116 144.907,166.116 143.891,165.1 ; C9.1 C10.2@155.956,161.1 ; D5.1 159.83,157.226 C10.2@155.956,161.1
JTCK: JTAG.9 R43.1 STM32F405RG.49 | length 68.2
  Top Layer w0.256: R43.1 116.586,101.028 v1(135.763,101.028) ; STM32F405RG.49 v1@139.839,129.298
  Top Layer w0.3: R43.1 115.633,94.615 118.618,94.615 JTAG.9
  Bottom Layer w0.256: v1@135.636,100.965 139.065,104.394 139.065,110.871 141.859,113.665 141.859,127.254 v1(139.763,129.35)
JTDI: JTAG.5 R36.2 STM32F405RG.50 | length 62.2
  Top Layer w0.256: STM32F405RG.50 137.235,130.631 v1@138.43,131.826
  Top Layer w0.3: R36.2 125.857,93.408 JTAG.5 127.063,91.249 v1(133.096,91.249)
  Bottom Layer w0.256: v1(133.096,91.249) 134.969,93.123 134.969,101.822 136.525,103.378 136.525,110.236 134.112,112.649 134.112,120.015 138.493,124.396 v1(138.493,131.762)
JTDO: JTAG.13 STM32F405RG.55 | length 62.7
  Top Layer w0.256: STM32F405RG.55 134.735,130.671 137.922,133.858 v1@137.922,134.175
  Bottom Layer w0.256: JTAG.13 118.491,95.25 127.889,95.25 131.699,99.06 131.699,122.809 137.986,129.095 137.986,131.453 137.915,131.523 137.915,134.105 v1(137.986,134.175)
JTMS: JTAG.7 R37.2 STM32F405RG.46 | length 75.1
  Top Layer w0.256: STM32F405RG.46 148.673,126.448 v1(149.098,126.873)
  Top Layer w0.3: R37.2 120.332,94.361 121.412,94.361 JTAG.7
  Bottom Layer w0.3: JTAG.7 124.587,91.186 131.445,91.186 132.207,90.424 133.119,90.424 152.146,109.451 152.146,125.857 151.13,126.873 v1(149.098,126.873)
JTRST: JTAG.3 R34.2 STM32F405RG.56 | length 52.2
  Top Layer w0.256: STM32F405RG.56 134.235,130.806 136.652,133.223 v1(136.652,134.175)
  Top Layer w0.3: v1(127.127,97.472) 127.127,93.726 JTAG.3
  Bottom Layer w0.256: v1@127.127,97.409 129.032,99.314 129.032,125.73 135.82,132.518 135.875,132.518 136.652,133.295 v1(136.652,134.175)
MUXOUT: U2.13 U3.1 | length 6.9
  Top Layer w0.256: U3.1 95.29,130.596 95.885,131.191 95.885,132.588 95.656,132.817 95.656,134.894 96.024,135.262 U2.13
NetC10_1: C10.1 D6.2 Q3.1 R23.1 R24.1 | length 20.1
  Top Layer w0.8: Q3.1 147.32,162.433 154.495,162.433 ; D6.2 152.336,159.004 C10.1 154.495,162.433 ; R24.1 R23.1 154.495,162.433
NetC11_1: C11.1 R26.2 | length 3.3
  Top Layer w0.8: R26.2 C11.1
NetC11_2: C11.2 P2.2 Q3.3 | length 17.6
  Top Layer w0.8: Q3.3@150.575,173.99 C11.2 154.495,174.18 155.321,175.006 158.496,175.006 162.687,170.815 P2.2
NetC16_1: C16.1 TPS5430.1 | length 9.1
  Top Layer w0.8: TPS5430.1 110.249,162.814 110.68,162.814 C16.1
NetC16_2: C16.2 D8.2 L1.1 TPS5430.8 | length 20.6
  Top Layer w0.8: L1.1 109.601,173.355 D8.2 116.776,171.894 C16.2 116.776,164.909 114.668,162.801 TPS5430.8@114.668,161.544
NetC37_1: C37.1 STM32F405RG.47 | length 6.5
  Top Layer w0.3: STM32F405RG.47 144.919,126.948 C37.1
NetC38_2: C38.2 STM32F405RG.31 | length 5
  Top Layer w0.3: C38.2 136.462,114.871 137.235,115.645 STM32F405RG.31
NetCAN1_1: CAN1.1 R47.1 U4.7 | length 17.4
  Top Layer w0.3: R47.1 160.972,140.51 U4.7 160.909,139.065 168.91,131.064 CAN1.1
NetCAN1_2: CAN1.2 R47.2 U4.6 | length 14.1
  Top Layer w0.3: R47.2 162.369,140.637 U4.6 162.179,139.192 165.307,136.064 CAN1.2
NetCAN2_1: CAN2.1 R49.1 U5.7 | length 15.3
  Top Layer w0.3: R49.1 160.591,125.143 U5.7 160.655,124.587 162.433,122.809 167.513,122.809 CAN2.1
NetCAN2_2: CAN2.2 R49.2 U5.6 | length 12.7
  Top Layer w0.3: U5.6 161.988,125.143 R49.2 167.687,127.635 CAN2.2
NetD1_1: D1.1 R5.2 | length 3.3
  Top Layer w0.3: D1.1 77.179,103.352 R5.2
NetD2_2: D2.2 R9.2 R10.1 | length 7.9
  Top Layer w0.3: R9.2 79.184,98.425 D2.2 81.471,98.692 R10.1
NetD3_1: D3.1 R15.2 | length 4.1
  Top Layer w0.3: D3.1 76.798,115.353 R15.2
NetD4_2: D4.2 pad.1@82.296,109.918 R19.2 R20.1 | length 8.5
  Top Layer w0.3: R20.1 82.309,113.208 D4.2
  Bottom Layer w0.5: v2(78.105,110.109) pad.1@82.308,110.109
NetDS1_1: DS1.1 R33.1 | length 2.7
  Top Layer w0.256: R33.1 150.621,136.081 DS1.1
NetDS2_1: DS2.1 R40.1 | length 2.7
  Top Layer w0.256: R40.1 145.922,136.081 DS2.1
NetP2_1: P2.1 S1.2 | length 8.8
  Top Layer w0.8: P2.1 171.287,161.29 S1.2
NetP3_1: P3.1 R23.2 S1.1 | length 32.2
  Top Layer w0.8: R23.2 155.892,162.877 159.258,159.512 167.132,159.512 ; S1.1 171.391,159.512 167.132,159.512 ; P3.1 172.507,154.137 167.132,159.512
NetPower_1: Power.1 R42.1 | length 2.7
  Top Layer w0.3: Power.1 100.582,97.598 R42.1
NetQ1_1: Q1.1 R10.2 R11.2 | length 6
  Top Layer w0.3: R10.2 R11.2 84.611,105.283 Q1.1
NetQ1_3: Q1.3 R4.1 R8.2 | length 5.2
  Top Layer w0.3: Q1.3 88.932,102.362 R8.2 R4.1
NetQ2_1: Q2.1 R20.2 R21.2 | length 6.1
  Top Layer w0.3: R20.2 82.804,114.109 R21.2 83.632,116.647 Q2.1
NetQ2_3: Q2.3 R16.1 R17.2 | length 5.6
  Top Layer w0.3: Q2.3 89.725,115.697 ; R17.2 89.725,115.697 ; R16.1 89.725,115.697
NetR1_1: R1.1 U1.2 | length 4.8
  Top Layer w0.3: U1.2 89.52,135.367 R1.1
NetR2_2: R2.2 U1.15 | length 5
  Top Layer w0.3: U1.15 89.52,126.507 91.694,124.333 R2.2
NetR6_1: R6.1 U1.7 | length 6.8
  Top Layer w0.3: R6.1 83.185,136.398 85.09,136.398 86.27,135.218 U1.7
NetR7_2: R7.2 U1.10 | length 10
  Top Layer w0.3: U1.10@86.27,126.802 U1.10
  Top Layer w0.4: R7.2 v2(82.169,126.238) ; v2(84.963,129.54) 85.635,129.54 86.27,128.905 U1.10
  Bottom Layer w0.4: v2(82.169,126.238) 82.169,126.746 v2(84.963,129.54)
NetR12_2: R12.2 U2.1 | length 6.6
  Top Layer w0.256: U2.1 99.314,137.045 101.104,135.255 103.06,135.255 R12.2
NetR22_2: R22.2 U3.3 | length 2.3
  Top Layer w0.256: U3.3 98.215,129.902 R22.2
NetR27_1: R27.1 R28.2 TPS5430.4 | length 16.7
  Top Layer w0.6: R27.1 101.663,160.782 105.029,160.782 108.204,157.607 TPS5430.4 110.947,155.511 R28.2
NetR29_1: R29.1 U*1.1 | length 5.9
  Top Layer w0.8: R29.1 84.772,160.782 86.884,160.782 U*1.1
NetR30_1: R30.1 U*1.4 | length 5.7
  Top Layer w0.3: R30.1 84.645,153.797 87.353,153.797 U*1.4
NetR31_1: R31.1 U*2.1 | length 7.8
  Top Layer w0.8: R31.1 87.122,173.228 88.138,174.244 90.932,174.244 92.044,173.132 U*2.1
NetR32_1: R32.1 U*2.4 | length 6.3
  Top Layer w0.8: R32.1 88.709,165.735 90.274,165.735 U*2.4
NetR38_1: R38.1 STM32F405RG.60 | length 8
  Top Layer w0.3: STM32F405RG.60 132.235,133.823 R38.1
PA2: STM32F405RG.16
PA3: STM32F405RG.17
PA4: STM32F405RG.20
PA8: STM32F405RG.41
PB1: STM32F405RG.27
PB8: STM32F405RG.61
PB9: STM32F405RG.62
PB10: STM32F405RG.29
PB11: STM32F405RG.30
PB14: STM32F405RG.35
PB15: STM32F405RG.36
PC6: STM32F405RG.37
PC7: STM32F405RG.38
PC8: STM32F405RG.39
PC9: STM32F405RG.40
PC10: DS1.2 STM32F405RG.51 | length 14.4
  Top Layer w0.256: STM32F405RG.51 136.735,131.02 138.056,132.341 147.273,132.341 DS1.2
PC11: STM32F405RG.52
PC12: STM32F405RG.53
PC13: STM32F405RG.2
PC14: C29.2 STM32F405RG.3 Y1.4 | length 17.6
  Top Layer w0.256: Y1.4 114.418,132.905 C29.2 122.789,126.448 STM32F405RG.3
PC15: C30.2 STM32F405RG.4 Y1.1 | length 23.8
  Top Layer w0.256: C30.2 108.019,133.61 Y1.1 117.976,125.948 STM32F405RG.4
PD2: DS2.2 STM32F405RG.54 | length 10.8
  Top Layer w0.256: STM32F405RG.54 135.235,130.282 138.432,133.479 DS2.2
PH0: C31.2 R44.1 STM32F405RG.5 Y2.1 | length 42.3
  Top Layer w0.3: C31.2 R44.1 99.691,117.416 Y2.1 106.262,125.448 STM32F405RG.5
PH1: C32.2 R44.2 STM32F405RG.6 Y2.2 | length 43.4
  Top Layer w0.3: Y2.2 104.325,109.977 R44.2 106.362,109.347 107.632,109.347 C32.2 ; 108.013,109.728 108.013,120.078 112.883,124.948 STM32F405RG.6
RESET: C27.1 JTAG.15 R35.1 R41.2 RESET.1 STM32F405RG.7 | length 78.1
  Top Layer w0.256: RESET.1 94.467,90.509 R35.1 C27.1 97.218,100.584 103.251,100.584 ; JTAG.15@113.157,92.647 R41.2 106.489,97.346 103.251,100.584 ; STM32F405RG.7 113.284,124.448 110.363,121.527 110.363,107.696 103.251,100.584
  Top Layer w0.8: JTAG.15 JTAG.15@113.157,92.647
RESET_N: P4.3 R48.1 STM32F405RG.26 | length 14.7
  Top Layer w0.256: STM32F405RG.26 134.735,116.459 v1@134.989,116.205 ; P4.3 140.843,111.923 R48.1
  Bottom Layer w0.256: v1(135.001,116.205) 137.033,114.173 140.081,114.173 v1@140.843,113.411
  other v1: 140.843,113.538
RX: STM32F405RG.43 UART1.3 | length 46.4
  Top Layer w0.256: STM32F405RG.43 157.373,124.948 160.401,121.92 166.624,121.92 169.037,119.507 169.037,109.855 UART1.3
SCL: R13.2 STM32F405RG.58 U2.3 | length 43.6
  Top Layer w0.256: U2.3 100.969,138.045 101.854,137.16 R13.2
  Top Layer w0.3: STM32F405RG.58 133.235,132.092 v1(134.556,133.413)
  Bottom Layer w0.3: v1(101.854,135.89) 104.331,133.413 v1(134.556,133.413)
SDA: R14.1 STM32F405RG.59 U2.4 | length 47.1
  Top Layer w0.256: U2.4 98.921,138.545 101.282,140.906 R14.1
  Top Layer w0.3: STM32F405RG.59 132.735,132.989 v1(135.064,135.319)
  Bottom Layer w0.3: v1(103.632,140.97) 115.316,140.97 120.968,135.319 v1(135.064,135.319)
SPI_CLK: P4.8 STM32F405RG.21 | length 13.3
  Top Layer w0.3: P4.8 125.22,112.266 128.778,115.824 131.064,115.824 132.235,116.995 STM32F405RG.21
SPI_CS: P4.7 STM32F405RG.25 | length 17.1
  Top Layer w0.256: P4.7 129.445,107.315 132.715,107.315 134.235,108.835 STM32F405RG.25
SPI_INTR: P4.6 STM32F405RG.24 | length 10.5
  Top Layer w0.3: P4.6 133.735,112.435 STM32F405RG.24
SPI_MISO: P4.5 STM32F405RG.22 | length 16.7
  Top Layer w0.256: STM32F405RG.22 132.735,115.082 131.826,114.173 130.175,114.173 129.032,113.03 129.032,108.458 129.667,107.823 131.663,107.823 P4.5
SPI_MOSI: P4.4 STM32F405RG.23 | length 10.7
  Top Layer w0.254: v1@132.334,113.03 133.235,113.931 STM32F405RG.23
  Bottom Layer w0.254: v1(132.461,113.03) 132.461,111.919 P4.4
TX: STM32F405RG.42 UART1.2 | length 47.8
  Top Layer w0.256: STM32F405RG.42 156.222,124.448 159.893,120.777 166.243,120.777 167.894,119.126 167.894,108.458 UART1.2
VCC3V3: C3.1 C23.1 C25.1 C26.1 C28.2 C35.1 C36.1 C39.2 C40.2 C41.2 D1.2 D3.2 D9.2 JTAG.1 JTAG.2 pad.1@79.248,117.411 pad.1@79.629,105.346 pad.1@91.186,105.219 pad.1@91.186,117.411 pad.1@108.458,98.742 pad.1@117.348,98.742 pad.1@121.793,98.87 pad.1@127.127,98.87 pad.2@81.026,167.386 pad.2@101.854,134.556 pad.2@103.632,139.51 pad.2@103.759,131.699 pad.2@103.759,136.017 pad.5@90.392,93.091 pad.5@119.729,117.729 pad.6@130.112,136.271 pad.6@144.463,136.144 pad.6@145.732,129.413 pad.6@149.161,136.144 pad.6@161.353,117.094 pad.6@161.734,131.953 pad.6@161.988,119.38 pad.6@162.243,134.747 pad.8@131.064,114.871 pad.8@136.368,120.87 pad.8@138.049,114.871 pad.8@140.843,114.871 R4.2 R12.1 R13.1 R14.2 R16.2 R32.2 R33.2 R34.1 R35.2 R36.1 R37.1 R40.2 R41.1 R42.2 R45.1 R48.2 STM32F405RG.19 STM32F405RG.32 STM32F405RG.48 STM32F405RG.64 U2.16 U4.3 U5.3 U*2.3 UART1.4 | length 62.7
  Top Layer w0.256: U2.16 99.312,134.556 R13.1
  Top Layer w0.3: R37.1 C26.1 ; C28.2 130.235,136.148 STM32F405RG.64 ; STM32F405RG.19 131.235,119.932 132.207,120.904 136.779,120.904 137.735,119.948 STM32F405RG.32 137.735,116.392 138.049,116.078 C39.2 R48.2 ; STM32F405RG.48 141.55,129.413 C35.1
  Top Layer w0.8: D9.2@81.026,167.386 D9.2 82.931,167.386 C23.1 86.804,169.037 R32.2 C25.1 89.44,169.005 U*2.3
  other v2: 100.584,99.06
VCC5V: C4.2 C19.1 C21.1 D10.2 Header2*3.1 Header2*3.2 pad.1@95.504,124.396 pad.2@76.962,154.305 pad.2@80.772,155.956 pad.2@88.392,156.337 R30.2 U3.5 U*1.3 | length 16.8
  Top Layer w0.254: C19.1 81.121,156.305 U*1.3
  Top Layer w0.3: U3.5 94.631,131.842 93.853,131.064 93.853,126.174 C4.2
VCC7V: C13.1 C15.1 C17.1 C18.1 C20.1 C22.1 C24.1 L1.2 P4.1 P4.2 pad.2@101.219,170.688 pad.2@108.458,165.1 R25.2 R27.2 R29.2 R31.2 U*1.2 U*2.2 | length 170.5
  Top Layer w0.8: C15.1 R25.2 79.947,150.685 C13.1 81.026,152.654 94.742,152.654 ; R29.2 C20.1 85.971,157.805 U*1.2 89.591,157.805 94.742,152.654 ; R31.2 C24.1 89.654,170.505 U*2.2 93.797,170.505 95.885,172.593 99.314,172.593 C22.1 ; C17.1 102.235,152.654 100.711,152.654 ; L1.2 107.505,164.147 R27.2 99.623,164.147 96.266,160.791 96.266,157.099 C18.1 100.711,152.654 ; P4.2 P4.1 ; 94.742,152.654 100.711,152.654
  Bottom Layer w0.8: v3@103.378,151.257 140.97,151.257 147.447,144.78 147.447,136.652 143,132.205 P4.1
  other v3: 103.505,151.257
VCC24V: C6.1 C8.1 C9.2 D5.2 P3.2 pad.0@114.668,160.147 pad.0@120.65,162.179 pad.2@133.731,155.321 pad.2@164.719,157.226 pad.2@168.148,147.955 TPS5430.7 | length 59.9
  Top Layer w0.6: D5.2 168.107,153.762 P3.2
  Top Layer w0.8: C8.1 127.7,155.448 C6.1 133.816,155.354 155.956,155.354 ; C9.2 155.956,155.354 ; D5.2 162.771,155.354 155.956,155.354
VDD_ADG711: C1.2 Header2*3.4 pad.1@82.677,128.714 U1.13 | length 9.1
  Top Layer w0.3: C1.2 82.677,128.651 84.963,126.365 87.865,126.365 88.22,126.72 U1.13
VDDA: C33.1 C34.1 R45.2 STM32F405RG.13 | length 9.6
  Top Layer w0.256: R45.2 121.349,119.189 121.666,119.507 122.301,119.507 124.242,121.448 STM32F405RG.13
VREF5V: C12.1 C14.1 D7.2 Header2*3.5 Header2*3.6 R25.1 | length 22.2
  Top Layer w0.5: D7.2 81.343,142.845 R25.1 83.757,151.003 C12.1 88.456,151.003 C14.1 91.504,150.558 Header2*3.5 Header2*3.6
pads on no net: D7.3 JTAG.11 JTAG.17 JTAG.19 P1.3 P1.4 P1.5 P1.6 P1.7 P1.8 P2.3 S1.3 S1.4 S1.5 STM32F405RG.1 TPS5430.2 TPS5430.3 TPS5430.5 U1.4 U1.12 U2.7 U2.17 U4.5 U5.5 Y1.2 Y1.3

## Polygon pours and split planes (outlines as drawn)
GND on GND (split plane): 174.49,142.786 167.762,142.786 167.76,142.798 167.732,142.84 159.985,150.587 159.943,150.615 159.893,150.624 98.806,150.624 98.756,150.615 98.714,150.587 98.686,150.545 98.677,150.495 98.677,141.226 75.51,141.226 75.51,176.02 174.49,176.02
AGND on GND (split plane): 96.391,138.303 96.4,138.253 96.428,138.211 97.153,137.487 97.153,135.763 97.162,135.713 97.19,135.671 101.979,130.883 101.979,124.006 100.149,122.176 82.096,122.176 80.647,123.625 80.647,126.238 80.638,126.288 80.61,126.33 78.197,128.743 78.155,128.771 78.105,128.78 75.51,128.78 75.51,140.968 96.391,140.968
DGND on GND (split plane): 167.457,142.748 167.429,142.706 167.419,142.656 167.429,142.607 167.457,142.565 167.499,142.537 167.548,142.527 174.49,142.527 174.49,85.51 75.51,85.51 75.51,128.522 78.051,128.522 80.389,126.184 80.389,123.571 80.398,123.521 80.426,123.479 81.95,121.955 81.992,121.927 82.042,121.918 100.203,121.918 100.253,121.927 100.295,121.955 102.2,123.86 102.228,123.902 102.237,123.952 102.237,130.937 102.228,130.987 102.2,131.029 97.411,135.817 97.411,137.541 97.402,137.591 97.374,137.633 96.649,138.357 96.649,140.968 98.806,140.968 98.856,140.977 98.898,141.005 98.926,141.047 98.935,141.097 98.935,150.366 159.839,150.366
VCC24V on VCC (split plane): 174.49,143.25 167.848,143.25 159.994,151.104 159.918,151.167 159.831,151.213 159.737,151.242 159.639,151.251 128.732,151.251 124.942,155.041 124.866,155.104 124.779,155.15 124.685,155.179 124.587,155.188 115.443,155.188 115.401,155.184 112.643,157.942 112.643,176.02 174.49,176.02
VCC7V on VCC (split plane): 111.639,157.734 111.648,157.636 111.677,157.542 111.723,157.455 111.786,157.379 114.077,155.088 103.29,155.088 98.192,160.186 98.192,176.02 111.639,176.02
VDD_ADG711 on VCC (split plane): 93.724,148.59 93.733,148.54 93.761,148.498 93.803,148.47 93.853,148.461 95.629,148.461 95.629,145.936 94.591,140.748 94.396,140.554 94.368,140.512 94.359,140.462 94.359,130.048 94.359,124.387 92.148,122.176 82.096,122.176 80.647,123.625 80.647,126.238 80.638,126.288 80.61,126.33 79.403,127.536 79.377,127.562 79.377,144.218 81.88,146.72 81.908,146.762 81.917,146.812 81.917,152.906 93.724,152.906
VCC5V on VCC (split plane): 98.55,152.473 98.55,146.739 98.206,146.396 98.178,146.354 98.169,146.304 98.169,143.183 96.428,141.443 96.4,141.401 96.391,141.351 96.391,139.827 96.391,138.176 96.4,138.126 96.428,138.084 97.153,137.36 97.153,135.763 97.153,132.896 96.177,131.92 96.149,131.878 96.139,131.828 96.089,131.819 96.047,131.791 96.019,131.749 96.01,131.699 96.01,123.244 92.529,119.763 75.51,119.763 75.51,163.066 87.957,163.066
VCC3V3 on VCC (split plane): 97.388,160.02 97.396,159.942 97.419,159.866 97.456,159.797 97.506,159.736 102.84,154.402 102.901,154.352 102.97,154.315 103.046,154.292 103.124,154.284 114.891,154.284 114.91,154.268 114.997,154.222 115.091,154.193 115.189,154.184 115.287,154.193 115.316,154.202 115.345,154.193 115.443,154.184 124.379,154.184 128.169,150.394 128.245,150.331 128.332,150.285 128.426,150.256 128.524,150.247 159.431,150.247 167.285,142.393 167.361,142.33 167.448,142.284 167.542,142.255 167.64,142.246 174.49,142.246 174.49,85.51 75.51,85.51 75.51,119.505 92.583,119.505 92.633,119.514 92.675,119.542 96.231,123.098 96.259,123.14 96.268,123.19 96.268,131.699 96.318,131.709 96.36,131.737 97.374,132.75 97.402,132.792 97.411,132.842 97.411,135.763 97.411,137.414 97.402,137.464 97.374,137.506 96.649,138.23 96.649,139.827 96.649,141.297 98.39,143.037 98.418,143.079 98.427,143.129 98.427,146.25 98.771,146.593 98.799,146.635 98.808,146.685 98.808,152.527 98.799,152.577 98.771,152.619 88.103,163.287 88.061,163.315 88.011,163.324 75.51,163.324 75.51,176.02 97.388,176.02

## Keep-outs
Keep-Out Layer:
  the board outline again, w0.254

## Other copper
VCC (plane layer: these items are gaps in the copper):
  lines w0.254: 75,119.634 92.583,119.634 96.139,123.19 96.139,131.699 ; 75,163.195 88.011,163.195 98.679,152.527 98.679,146.685 98.298,146.304 98.298,143.129 96.52,141.351 96.52,139.827 96.52,138.176 97.282,137.414 97.282,135.763 97.282,132.842 96.268,131.828 ; 79.311,127.444 79.248,127.508 ; 91.44,165.227 91.44,165.354 ; 115.189,154.686 115.443,154.686 ; 79.248,127.508 80.518,126.238 80.518,123.571 82.042,122.047 92.202,122.047 94.488,124.333 94.488,130.048 94.488,140.462 94.71,140.684 95.758,145.923 95.758,148.59 93.853,148.59 93.853,153.035 81.788,153.035 81.788,146.812 79.248,144.272 79.248,127.508
  lines w0.8: 97.79,176.53 97.79,160.02 103.124,154.686 115.443,154.686
  lines w1: 112.141,176.53 112.141,157.734 115.189,154.686 ; 115.443,154.686 124.587,154.686 128.524,150.749 159.639,150.749 167.64,142.748 174.935,142.748
GND (plane layer: these items are gaps in the copper):
  lines w0.254: 74.803,141.097 98.44,141.097 98.806,141.097 98.806,150.495 159.893,150.495 167.64,142.748 ; 75,128.651 78.105,128.651 80.518,126.238 80.518,123.571 82.042,122.047 100.203,122.047 102.108,123.952 102.108,130.937 97.282,135.763 97.282,137.541 96.52,138.303 96.52,141.097 ; 167.548,142.656 174.844,142.656 174.879,142.621

## Silkscreen, mask and mechanical layers (free items; w line width, h text height)
Top Overlay:
  text "ADC" at 93.726,151.384 h1
  text "VCC5V" at 100.203,146.05 h1 r90
  text "Vref5V" at 90.805,145.796 h1 r90
  text "ADG" at 93.599,144.653 h1
  text "L" at 171.196,139.7 h1 r90
  text "H" at 170.688,116.205 h1 r270
  text "VCC" at 170.434,107.95 h1 r90
  text "RX" at 170.434,105.537 h1 r90
  text "TX" at 170.434,102.997 h1 r90
  text "GND" at 170.434,99.568 h1 r90
Mechanical 1:
  lines w0.254: 70,85 175,85 175,176.53 70.358,176.53 70,176.172 ; 75,85 75,176.172
Drill Drawing:
  text ".LEGEND" at 182.88,81.28 h1
  text "Drill Drawing." at 182.88,78.74 h1

## Dimensions
75,85 to 75,176.53 on Mechanical 1
75,85 to 175,85 on Mechanical 1